# EAGLE board ADXL345_Breakout-Panel-v14 (EAGLE 6.5.0), part 1 of 3
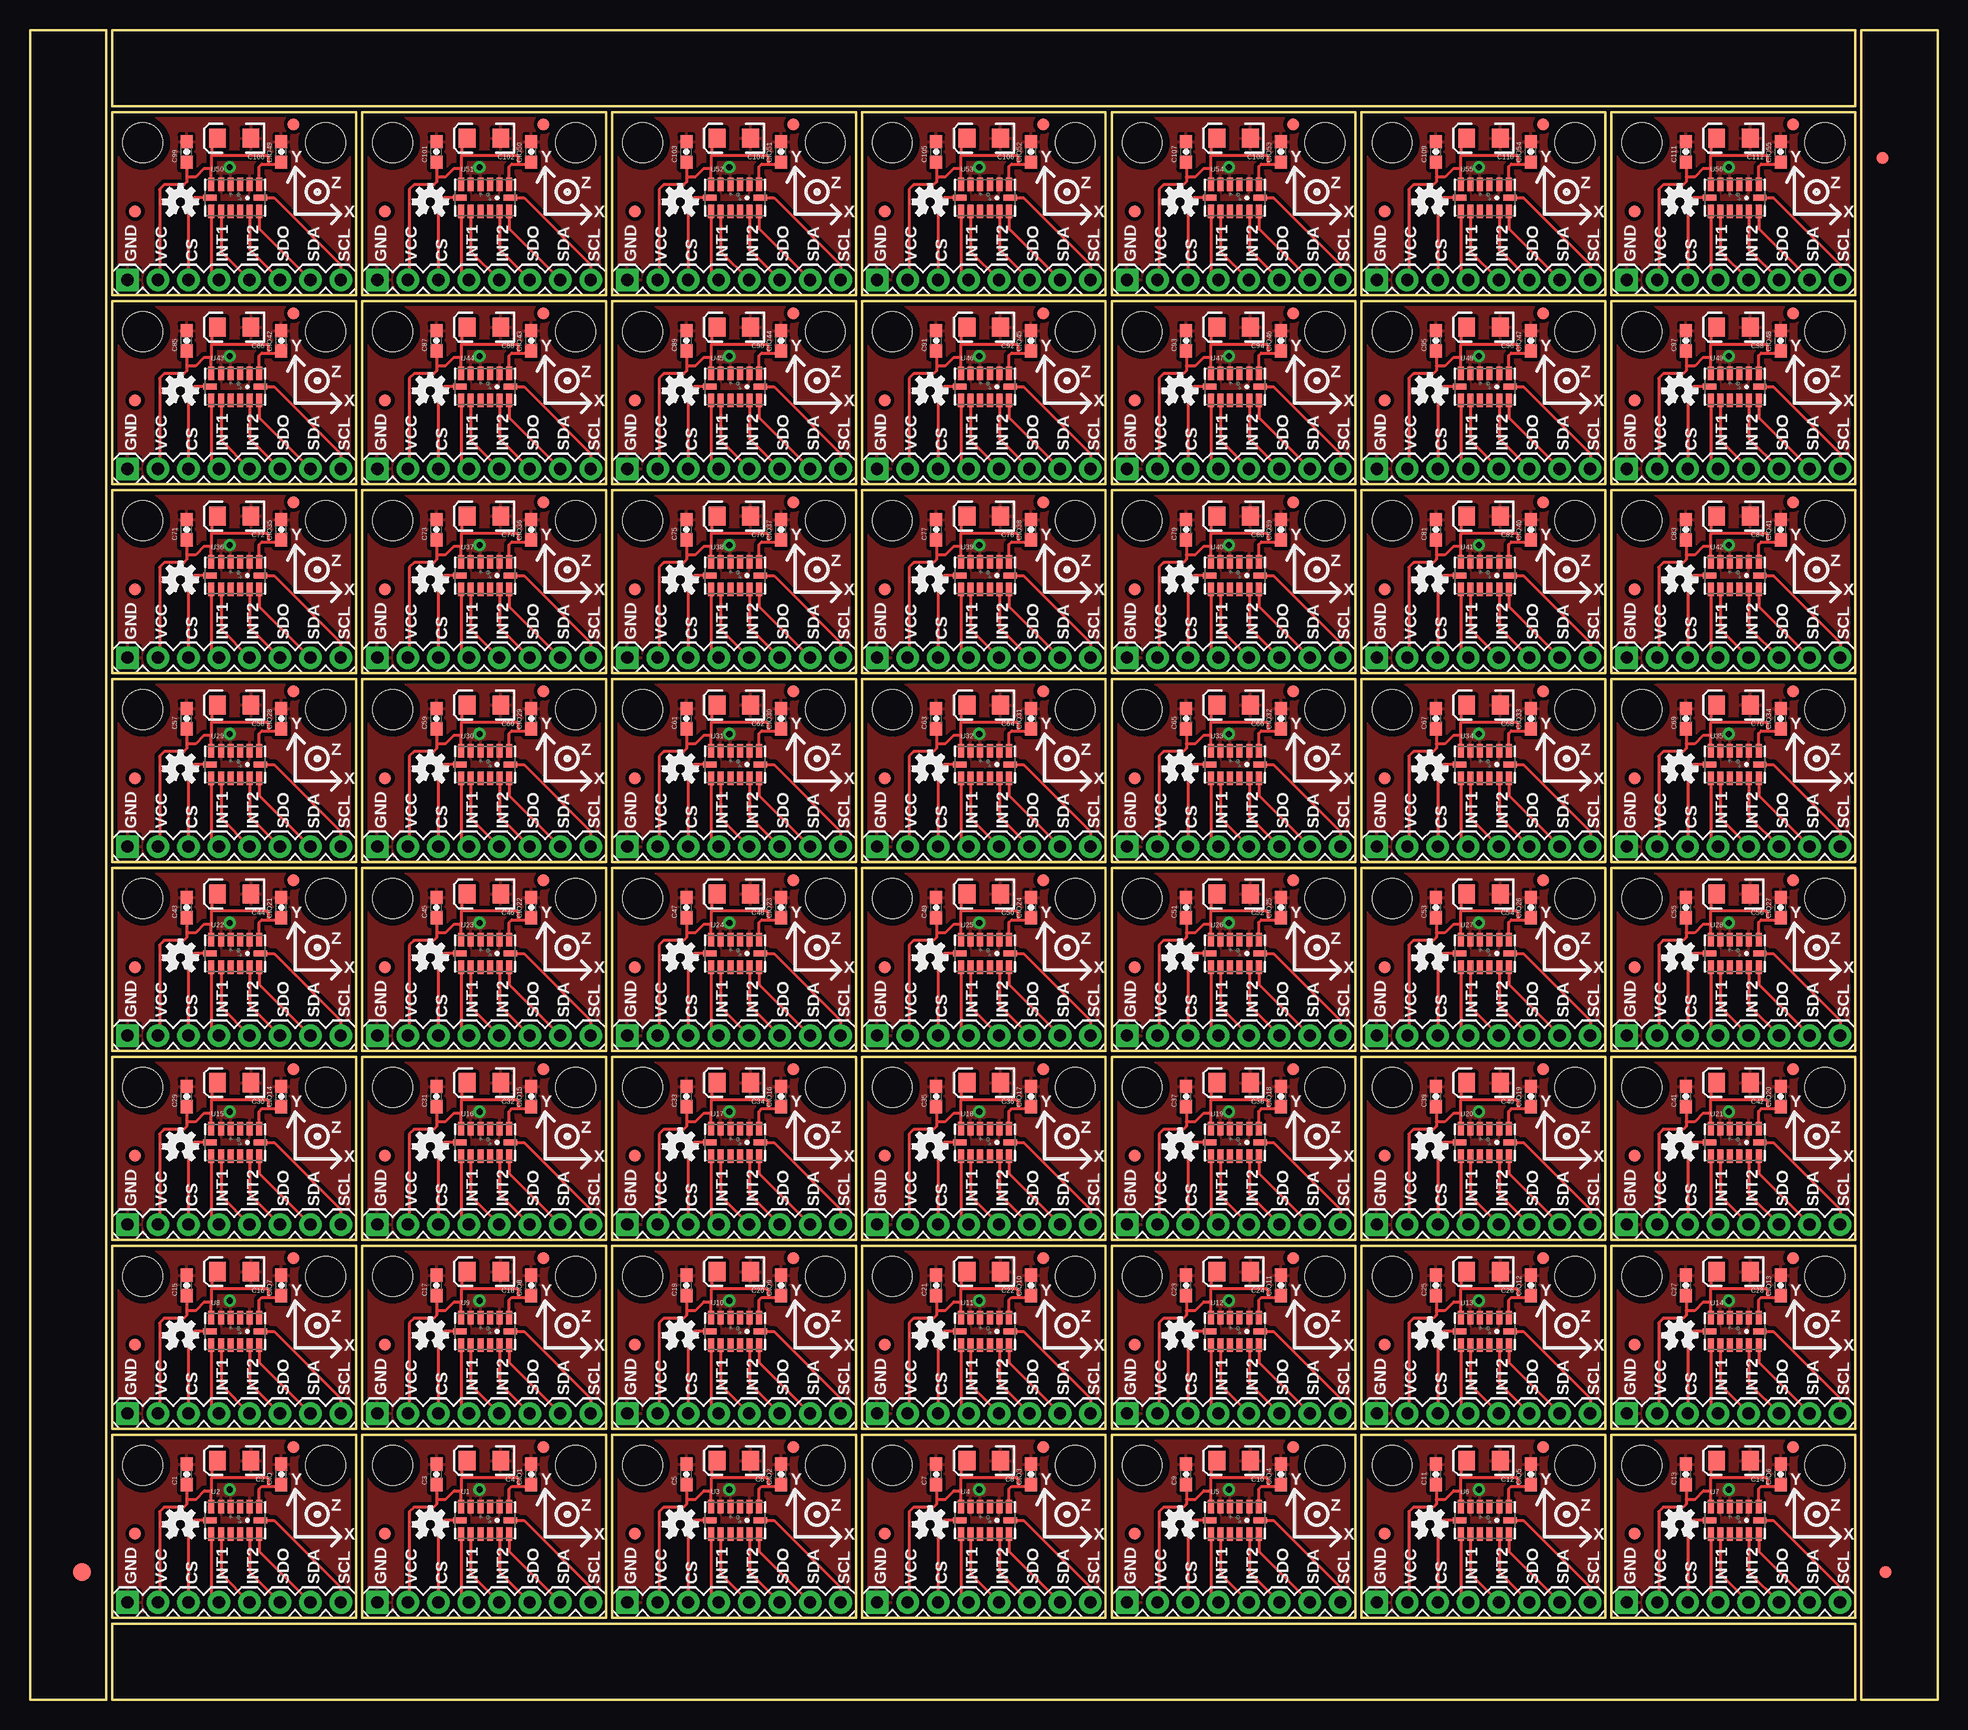
[diagram p0: board, top side]
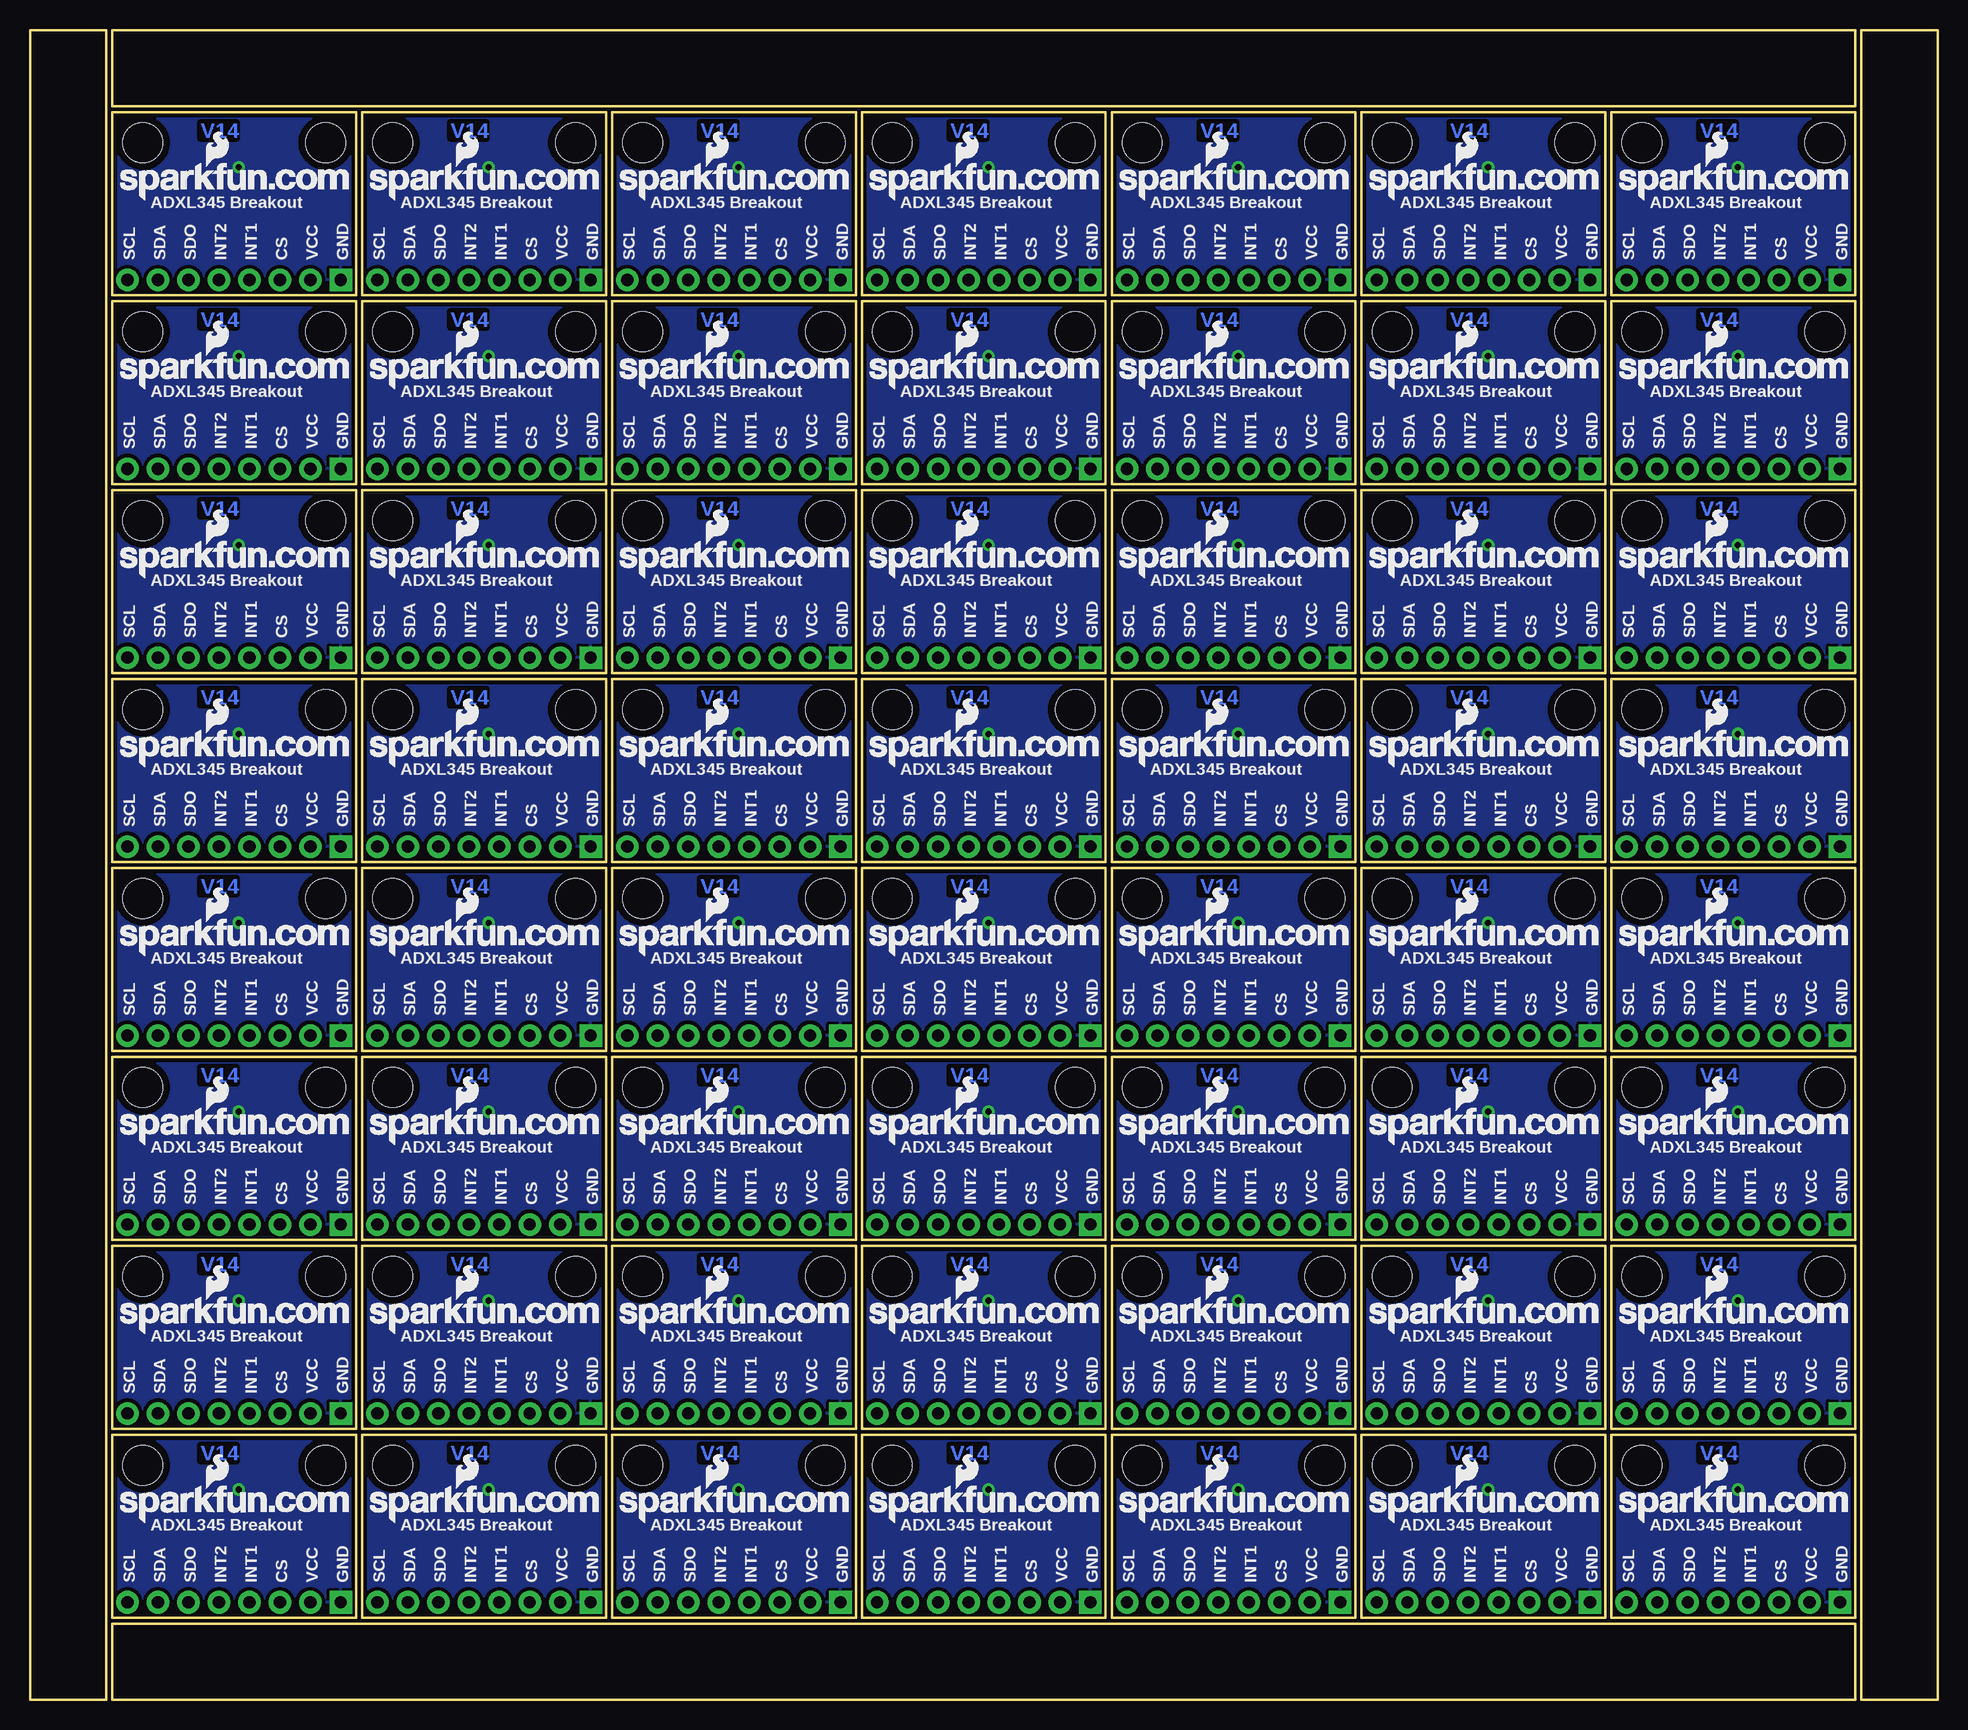
[diagram p1: board, bottom side, seen from below]

Size 159 x 139.19 mm. Coordinates in mm from the lower left corner, seen from the top.
Outline: 240 segments
Copper layers (1*16): Top 0.035mm / dielectric 1.5mm / Bottom 0.035mm
Design rules "SparkFun *": minimum track width 8mil, minimum drill 20mil, track to track 8mil, track to pad 8mil, pad to pad 8mil, via to via 8mil, smd to smd 8mil, copper to edge 8mil, drill to drill 8mil, minimum pad ring 12mil, minimum via ring 10mil, stop-mask expansion 4mil, vias tented up to drill 20mil, thermal gap 10mil
tRestrict: area 16.2,15.7 to 16.5,16; area 17,15.7 to 17.2,15.9; area 37,15.7 to 37.3,16; area 37.8,15.7 to 38.1,15.9; area 57.9,15.7 to 58.1,16; area 58.6,15.7 to 58.9,15.9; area 78.7,15.7 to 78.9,16; area 79.5,15.7 to 79.7,15.9; area 99.5,15.7 to 99.8,16; area 100.3,15.7 to 100.6,15.9; area 120.3,15.7 to 120.6,16; area 121.1,15.7 to 121.4,15.9; 100 more areas

## Footprints (pad centres in the part's own frame; a part is rotated, then mirrored left to right if it is on the bottom)
0603-CAP = smd 1.1 x 1: 1 -0.85,0; 2 0.85,0
EIA3216 = smd 1.4 x 1.6: A 1.4,0; C -1.4,0
FIDUCIAL-1.5X3 = smd 1.5 x 1.5: 1 0,0
FIDUCIAL-1X2 = smd 1 x 1: 1 0,0
1X08 = drill 1.016 pad 1.88 square: 1 0,0 | drill 1.016 pad 1.88: 2 2.54,0; 3 5.08,0; 4 7.62,0; 5 10.16,0; 6 12.7,0; 7 15.24,0; 8 17.78,0
STAND-OFF = hole 3.302: 0,0
LGA14_1:1_PATRICK = smd 0.5 x 1.124: 1 2,1.138; 2 1.2,1.138; 3 0.4,1.138; 4 -0.4,1.138; 5 -1.2,1.138; 6 -2,1.138; 8 -2,-1.13; 9 -1.2,-1.138; 10 -0.4,-1.138; 11 0.4,-1.138; 12 1.2,-1.138; 13 2,-1.138 | smd 1.124 x 0.5: 7 -2.1,0; 14 2.1,0

## Placement (x,y rotation side)
C1  0.1uF  [0603-CAP]  13.06,18.8 90 top
C2  10uF  [EIA3216]  17.02,19.94 180 top
C3  0.1uF  [0603-CAP]  33.88,18.8 90 top
C4  10uF  [EIA3216]  37.85,19.94 180 top
C5  0.1uF  [0603-CAP]  54.71,18.8 90 top
C6  10uF  [EIA3216]  58.67,19.94 180 top
C7  0.1uF  [0603-CAP]  75.54,18.8 90 top
C8  10uF  [EIA3216]  79.5,19.94 180 top
C9  0.1uF  [0603-CAP]  96.37,18.8 90 top
C10  10uF  [EIA3216]  100.33,19.94 180 top
C11  0.1uF  [0603-CAP]  117.2,18.8 90 top
C12  10uF  [EIA3216]  121.16,19.94 180 top
C13  0.1uF  [0603-CAP]  138.02,18.8 90 top
C14  10uF  [EIA3216]  141.99,19.94 180 top
C15  0.1uF  [0603-CAP]  13.06,34.54 90 top
C16  10uF  [EIA3216]  17.02,35.69 180 top
C17  0.1uF  [0603-CAP]  33.88,34.54 90 top
C18  10uF  [EIA3216]  37.85,35.69 180 top
C19  0.1uF  [0603-CAP]  54.71,34.54 90 top
C20  10uF  [EIA3216]  58.67,35.69 180 top
C21  0.1uF  [0603-CAP]  75.54,34.54 90 top
C22  10uF  [EIA3216]  79.5,35.69 180 top
C23  0.1uF  [0603-CAP]  96.37,34.54 90 top
C24  10uF  [EIA3216]  100.33,35.69 180 top
C25  0.1uF  [0603-CAP]  117.2,34.54 90 top
C26  10uF  [EIA3216]  121.16,35.69 180 top
C27  0.1uF  [0603-CAP]  138.02,34.54 90 top
C28  10uF  [EIA3216]  141.99,35.69 180 top
C29  0.1uF  [0603-CAP]  13.06,50.29 90 top
C30  10uF  [EIA3216]  17.02,51.44 180 top
C31  0.1uF  [0603-CAP]  33.88,50.29 90 top
C32  10uF  [EIA3216]  37.85,51.44 180 top
C33  0.1uF  [0603-CAP]  54.71,50.29 90 top
C34  10uF  [EIA3216]  58.67,51.44 180 top
C35  0.1uF  [0603-CAP]  75.54,50.29 90 top
C36  10uF  [EIA3216]  79.5,51.44 180 top
C37  0.1uF  [0603-CAP]  96.37,50.29 90 top
C38  10uF  [EIA3216]  100.33,51.44 180 top
C39  0.1uF  [0603-CAP]  117.2,50.29 90 top
C40  10uF  [EIA3216]  121.16,51.44 180 top
C41  0.1uF  [0603-CAP]  138.02,50.29 90 top
C42  10uF  [EIA3216]  141.99,51.44 180 top
C43  0.1uF  [0603-CAP]  13.06,66.04 90 top
C44  10uF  [EIA3216]  17.02,67.18 180 top
C45  0.1uF  [0603-CAP]  33.88,66.04 90 top
C46  10uF  [EIA3216]  37.85,67.18 180 top
C47  0.1uF  [0603-CAP]  54.71,66.04 90 top
C48  10uF  [EIA3216]  58.67,67.18 180 top
C49  0.1uF  [0603-CAP]  75.54,66.04 90 top
C50  10uF  [EIA3216]  79.5,67.18 180 top
C51  0.1uF  [0603-CAP]  96.37,66.04 90 top
C52  10uF  [EIA3216]  100.33,67.18 180 top
C53  0.1uF  [0603-CAP]  117.2,66.04 90 top
C54  10uF  [EIA3216]  121.16,67.18 180 top
C55  0.1uF  [0603-CAP]  138.02,66.04 90 top
C56  10uF  [EIA3216]  141.99,67.18 180 top
C57  0.1uF  [0603-CAP]  13.06,81.79 90 top
C58  10uF  [EIA3216]  17.02,82.93 180 top
C59  0.1uF  [0603-CAP]  33.88,81.79 90 top
C60  10uF  [EIA3216]  37.85,82.93 180 top
C61  0.1uF  [0603-CAP]  54.71,81.79 90 top
C62  10uF  [EIA3216]  58.67,82.93 180 top
C63  0.1uF  [0603-CAP]  75.54,81.79 90 top
C64  10uF  [EIA3216]  79.5,82.93 180 top
C65  0.1uF  [0603-CAP]  96.37,81.79 90 top
C66  10uF  [EIA3216]  100.33,82.93 180 top
C67  0.1uF  [0603-CAP]  117.2,81.79 90 top
C68  10uF  [EIA3216]  121.16,82.93 180 top
C69  0.1uF  [0603-CAP]  138.02,81.79 90 top
C70  10uF  [EIA3216]  141.99,82.93 180 top
C71  0.1uF  [0603-CAP]  13.06,97.54 90 top
C72  10uF  [EIA3216]  17.02,98.68 180 top
C73  0.1uF  [0603-CAP]  33.88,97.54 90 top
C74  10uF  [EIA3216]  37.85,98.68 180 top
C75  0.1uF  [0603-CAP]  54.71,97.54 90 top
C76  10uF  [EIA3216]  58.67,98.68 180 top
C77  0.1uF  [0603-CAP]  75.54,97.54 90 top
C78  10uF  [EIA3216]  79.5,98.68 180 top
C79  0.1uF  [0603-CAP]  96.37,97.54 90 top
C80  10uF  [EIA3216]  100.33,98.68 180 top
C81  0.1uF  [0603-CAP]  117.2,97.54 90 top
C82  10uF  [EIA3216]  121.16,98.68 180 top
C83  0.1uF  [0603-CAP]  138.02,97.54 90 top
C84  10uF  [EIA3216]  141.99,98.68 180 top
C85  0.1uF  [0603-CAP]  13.06,113.28 90 top
C86  10uF  [EIA3216]  17.02,114.43 180 top
C87  0.1uF  [0603-CAP]  33.88,113.28 90 top
C88  10uF  [EIA3216]  37.85,114.43 180 top
C89  0.1uF  [0603-CAP]  54.71,113.28 90 top
C90  10uF  [EIA3216]  58.67,114.43 180 top
C91  0.1uF  [0603-CAP]  75.54,113.28 90 top
C92  10uF  [EIA3216]  79.5,114.43 180 top
C93  0.1uF  [0603-CAP]  96.37,113.28 90 top
C94  10uF  [EIA3216]  100.33,114.43 180 top
C95  0.1uF  [0603-CAP]  117.2,113.28 90 top
C96  10uF  [EIA3216]  121.16,114.43 180 top
C97  0.1uF  [0603-CAP]  138.02,113.28 90 top
C98  10uF  [EIA3216]  141.99,114.43 180 top
C99  0.1uF  [0603-CAP]  13.06,129.03 90 top
C100  10uF  [EIA3216]  17.02,130.18 180 top
C101  0.1uF  [0603-CAP]  33.88,129.03 90 top
C102  10uF  [EIA3216]  37.85,130.18 180 top
C103  0.1uF  [0603-CAP]  54.71,129.03 90 top
C104  10uF  [EIA3216]  58.67,130.18 180 top
C105  0.1uF  [0603-CAP]  75.54,129.03 90 top
C106  10uF  [EIA3216]  79.5,130.18 180 top
C107  0.1uF  [0603-CAP]  96.37,129.03 90 top
C108  10uF  [EIA3216]  100.33,130.18 180 top
C109  0.1uF  [0603-CAP]  117.2,129.03 90 top
C110  10uF  [EIA3216]  121.16,130.18 180 top
C111  0.1uF  [0603-CAP]  138.02,129.03 90 top
C112  10uF  [EIA3216]  141.99,130.18 180 top
CIO  0.1uF  [0603-CAP]  20.95,18.8 90 top
CIO1  0.1uF  [0603-CAP]  41.78,18.8 90 top
CIO2  0.1uF  [0603-CAP]  62.61,18.8 90 top
CIO3  0.1uF  [0603-CAP]  83.44,18.8 90 top
CIO4  0.1uF  [0603-CAP]  104.27,18.8 90 top
CIO5  0.1uF  [0603-CAP]  125.09,18.8 90 top
CIO6  0.1uF  [0603-CAP]  145.92,18.8 90 top
CIO7  0.1uF  [0603-CAP]  20.95,34.54 90 top
CIO8  0.1uF  [0603-CAP]  41.78,34.54 90 top
CIO9  0.1uF  [0603-CAP]  62.61,34.54 90 top
CIO10  0.1uF  [0603-CAP]  83.44,34.54 90 top
CIO11  0.1uF  [0603-CAP]  104.27,34.54 90 top
CIO12  0.1uF  [0603-CAP]  125.09,34.54 90 top
CIO13  0.1uF  [0603-CAP]  145.92,34.54 90 top
CIO14  0.1uF  [0603-CAP]  20.95,50.29 90 top
CIO15  0.1uF  [0603-CAP]  41.78,50.29 90 top
CIO16  0.1uF  [0603-CAP]  62.61,50.29 90 top
CIO17  0.1uF  [0603-CAP]  83.44,50.29 90 top
CIO18  0.1uF  [0603-CAP]  104.27,50.29 90 top
CIO19  0.1uF  [0603-CAP]  125.09,50.29 90 top
CIO20  0.1uF  [0603-CAP]  145.92,50.29 90 top
CIO21  0.1uF  [0603-CAP]  20.95,66.04 90 top
CIO22  0.1uF  [0603-CAP]  41.78,66.04 90 top
CIO23  0.1uF  [0603-CAP]  62.61,66.04 90 top
CIO24  0.1uF  [0603-CAP]  83.44,66.04 90 top
CIO25  0.1uF  [0603-CAP]  104.27,66.04 90 top
CIO26  0.1uF  [0603-CAP]  125.09,66.04 90 top
CIO27  0.1uF  [0603-CAP]  145.92,66.04 90 top
CIO28  0.1uF  [0603-CAP]  20.95,81.79 90 top
CIO29  0.1uF  [0603-CAP]  41.78,81.79 90 top
CIO30  0.1uF  [0603-CAP]  62.61,81.79 90 top
CIO31  0.1uF  [0603-CAP]  83.44,81.79 90 top
CIO32  0.1uF  [0603-CAP]  104.27,81.79 90 top
CIO33  0.1uF  [0603-CAP]  125.09,81.79 90 top
CIO34  0.1uF  [0603-CAP]  145.92,81.79 90 top
CIO35  0.1uF  [0603-CAP]  20.95,97.54 90 top
CIO36  0.1uF  [0603-CAP]  41.78,97.54 90 top
CIO37  0.1uF  [0603-CAP]  62.61,97.54 90 top
CIO38  0.1uF  [0603-CAP]  83.44,97.54 90 top
CIO39  0.1uF  [0603-CAP]  104.27,97.54 90 top
CIO40  0.1uF  [0603-CAP]  125.09,97.54 90 top
CIO41  0.1uF  [0603-CAP]  145.92,97.54 90 top
CIO42  0.1uF  [0603-CAP]  20.95,113.28 90 top
CIO43  0.1uF  [0603-CAP]  41.78,113.28 90 top
CIO44  0.1uF  [0603-CAP]  62.61,113.28 90 top
CIO45  0.1uF  [0603-CAP]  83.44,113.28 90 top
CIO46  0.1uF  [0603-CAP]  104.27,113.28 90 top
CIO47  0.1uF  [0603-CAP]  125.09,113.28 90 top
CIO48  0.1uF  [0603-CAP]  145.92,113.28 90 top
CIO49  0.1uF  [0603-CAP]  20.95,129.03 90 top
CIO50  0.1uF  [0603-CAP]  41.78,129.03 90 top
CIO51  0.1uF  [0603-CAP]  62.61,129.03 90 top
CIO52  0.1uF  [0603-CAP]  83.44,129.03 90 top
CIO53  0.1uF  [0603-CAP]  104.27,129.03 90 top
CIO54  0.1uF  [0603-CAP]  125.09,129.03 90 top
CIO55  0.1uF  [0603-CAP]  145.92,129.03 90 top
E$1  [FIDUCIAL-1.5X3]  4.32,10.67 0 top
E$4  [FIDUCIAL-1X2]  154.69,10.67 0 top
E$6  [FIDUCIAL-1X2]  154.43,128.52 180 top
JP1  [1X08]  8.13,8.13 0 top
JP2  STAND-OFF  [STAND-OFF]  9.4,19.56 0 top
JP3  STAND-OFF  [STAND-OFF]  24.64,19.56 0 top
JP4  FIDUCIAL1X2  [FIDUCIAL-1X2]  8.76,13.84 0 top
JP5  FIDUCIAL1X2  [FIDUCIAL-1X2]  21.97,21.08 0 top
JP6  [1X08]  28.96,8.13 0 top
JP7  STAND-OFF  [STAND-OFF]  30.23,19.56 0 top
JP8  STAND-OFF  [STAND-OFF]  45.47,19.56 0 top
JP9  FIDUCIAL1X2  [FIDUCIAL-1X2]  29.59,13.84 0 top
JP10  FIDUCIAL1X2  [FIDUCIAL-1X2]  42.8,21.08 0 top
JP11  [1X08]  49.78,8.13 0 top
JP12  STAND-OFF  [STAND-OFF]  51.05,19.56 0 top
JP13  STAND-OFF  [STAND-OFF]  66.29,19.56 0 top
JP14  FIDUCIAL1X2  [FIDUCIAL-1X2]  50.42,13.84 0 top
JP15  FIDUCIAL1X2  [FIDUCIAL-1X2]  63.63,21.08 0 top
JP16  [1X08]  70.61,8.13 0 top
JP17  STAND-OFF  [STAND-OFF]  71.88,19.56 0 top
JP18  STAND-OFF  [STAND-OFF]  87.12,19.56 0 top
JP19  FIDUCIAL1X2  [FIDUCIAL-1X2]  71.25,13.84 0 top
JP20  FIDUCIAL1X2  [FIDUCIAL-1X2]  84.45,21.08 0 top
JP21  [1X08]  91.44,8.13 0 top
JP22  STAND-OFF  [STAND-OFF]  92.71,19.56 0 top
JP23  STAND-OFF  [STAND-OFF]  107.95,19.56 0 top
JP24  FIDUCIAL1X2  [FIDUCIAL-1X2]  92.08,13.84 0 top
JP25  FIDUCIAL1X2  [FIDUCIAL-1X2]  105.28,21.08 0 top
JP26  [1X08]  112.27,8.13 0 top
JP27  STAND-OFF  [STAND-OFF]  113.54,19.56 0 top
JP28  STAND-OFF  [STAND-OFF]  128.78,19.56 0 top
JP29  FIDUCIAL1X2  [FIDUCIAL-1X2]  112.9,13.84 0 top
JP30  FIDUCIAL1X2  [FIDUCIAL-1X2]  126.11,21.08 0 top
JP31  [1X08]  133.1,8.13 0 top
JP32  STAND-OFF  [STAND-OFF]  134.37,19.56 0 top
JP33  STAND-OFF  [STAND-OFF]  149.61,19.56 0 top
JP34  FIDUCIAL1X2  [FIDUCIAL-1X2]  133.73,13.84 0 top
JP35  FIDUCIAL1X2  [FIDUCIAL-1X2]  146.94,21.08 0 top
JP36  [1X08]  8.13,23.88 0 top
JP37  STAND-OFF  [STAND-OFF]  9.4,35.31 0 top
JP38  STAND-OFF  [STAND-OFF]  24.64,35.31 0 top
JP39  FIDUCIAL1X2  [FIDUCIAL-1X2]  8.76,29.59 0 top
JP40  FIDUCIAL1X2  [FIDUCIAL-1X2]  21.97,36.83 0 top
JP41  [1X08]  28.96,23.88 0 top
JP42  STAND-OFF  [STAND-OFF]  30.23,35.31 0 top
JP43  STAND-OFF  [STAND-OFF]  45.47,35.31 0 top
JP44  FIDUCIAL1X2  [FIDUCIAL-1X2]  29.59,29.59 0 top
JP45  FIDUCIAL1X2  [FIDUCIAL-1X2]  42.8,36.83 0 top
JP46  [1X08]  49.78,23.88 0 top
JP47  STAND-OFF  [STAND-OFF]  51.05,35.31 0 top
JP48  STAND-OFF  [STAND-OFF]  66.29,35.31 0 top
JP49  FIDUCIAL1X2  [FIDUCIAL-1X2]  50.42,29.59 0 top
JP50  FIDUCIAL1X2  [FIDUCIAL-1X2]  63.63,36.83 0 top
JP51  [1X08]  70.61,23.88 0 top
JP52  STAND-OFF  [STAND-OFF]  71.88,35.31 0 top
JP53  STAND-OFF  [STAND-OFF]  87.12,35.31 0 top
JP54  FIDUCIAL1X2  [FIDUCIAL-1X2]  71.25,29.59 0 top
JP55  FIDUCIAL1X2  [FIDUCIAL-1X2]  84.45,36.83 0 top
JP56  [1X08]  91.44,23.88 0 top
JP57  STAND-OFF  [STAND-OFF]  92.71,35.31 0 top
JP58  STAND-OFF  [STAND-OFF]  107.95,35.31 0 top
JP59  FIDUCIAL1X2  [FIDUCIAL-1X2]  92.08,29.59 0 top
JP60  FIDUCIAL1X2  [FIDUCIAL-1X2]  105.28,36.83 0 top
JP61  [1X08]  112.27,23.88 0 top
JP62  STAND-OFF  [STAND-OFF]  113.54,35.31 0 top
JP63  STAND-OFF  [STAND-OFF]  128.78,35.31 0 top
JP64  FIDUCIAL1X2  [FIDUCIAL-1X2]  112.9,29.59 0 top
JP65  FIDUCIAL1X2  [FIDUCIAL-1X2]  126.11,36.83 0 top
JP66  [1X08]  133.1,23.88 0 top
JP67  STAND-OFF  [STAND-OFF]  134.37,35.31 0 top
JP68  STAND-OFF  [STAND-OFF]  149.61,35.31 0 top
JP69  FIDUCIAL1X2  [FIDUCIAL-1X2]  133.73,29.59 0 top
JP70  FIDUCIAL1X2  [FIDUCIAL-1X2]  146.94,36.83 0 top
JP71  [1X08]  8.13,39.62 0 top
JP72  STAND-OFF  [STAND-OFF]  9.4,51.05 0 top
JP73  STAND-OFF  [STAND-OFF]  24.64,51.05 0 top
JP74  FIDUCIAL1X2  [FIDUCIAL-1X2]  8.76,45.34 0 top
JP75  FIDUCIAL1X2  [FIDUCIAL-1X2]  21.97,52.58 0 top
JP76  [1X08]  28.96,39.62 0 top
JP77  STAND-OFF  [STAND-OFF]  30.23,51.05 0 top
JP78  STAND-OFF  [STAND-OFF]  45.47,51.05 0 top
JP79  FIDUCIAL1X2  [FIDUCIAL-1X2]  29.59,45.34 0 top
JP80  FIDUCIAL1X2  [FIDUCIAL-1X2]  42.8,52.58 0 top
JP81  [1X08]  49.78,39.62 0 top
JP82  STAND-OFF  [STAND-OFF]  51.05,51.05 0 top
JP83  STAND-OFF  [STAND-OFF]  66.29,51.05 0 top
JP84  FIDUCIAL1X2  [FIDUCIAL-1X2]  50.42,45.34 0 top
JP85  FIDUCIAL1X2  [FIDUCIAL-1X2]  63.63,52.58 0 top
JP86  [1X08]  70.61,39.62 0 top
JP87  STAND-OFF  [STAND-OFF]  71.88,51.05 0 top
JP88  STAND-OFF  [STAND-OFF]  87.12,51.05 0 top
JP89  FIDUCIAL1X2  [FIDUCIAL-1X2]  71.25,45.34 0 top
JP90  FIDUCIAL1X2  [FIDUCIAL-1X2]  84.45,52.58 0 top
JP91  [1X08]  91.44,39.62 0 top
JP92  STAND-OFF  [STAND-OFF]  92.71,51.05 0 top
JP93  STAND-OFF  [STAND-OFF]  107.95,51.05 0 top
JP94  FIDUCIAL1X2  [FIDUCIAL-1X2]  92.08,45.34 0 top
JP95  FIDUCIAL1X2  [FIDUCIAL-1X2]  105.28,52.58 0 top
JP96  [1X08]  112.27,39.62 0 top
JP97  STAND-OFF  [STAND-OFF]  113.54,51.05 0 top
JP98  STAND-OFF  [STAND-OFF]  128.78,51.05 0 top
JP99  FIDUCIAL1X2  [FIDUCIAL-1X2]  112.9,45.34 0 top
JP100  FIDUCIAL1X2  [FIDUCIAL-1X2]  126.11,52.58 0 top
JP101  [1X08]  133.1,39.62 0 top
JP102  STAND-OFF  [STAND-OFF]  134.37,51.05 0 top
JP103  STAND-OFF  [STAND-OFF]  149.61,51.05 0 top
JP104  FIDUCIAL1X2  [FIDUCIAL-1X2]  133.73,45.34 0 top
JP105  FIDUCIAL1X2  [FIDUCIAL-1X2]  146.94,52.58 0 top
JP106  [1X08]  8.13,55.37 0 top
JP107  STAND-OFF  [STAND-OFF]  9.4,66.8 0 top
JP108  STAND-OFF  [STAND-OFF]  24.64,66.8 0 top
JP109  FIDUCIAL1X2  [FIDUCIAL-1X2]  8.76,61.09 0 top
JP110  FIDUCIAL1X2  [FIDUCIAL-1X2]  21.97,68.33 0 top
JP111  [1X08]  28.96,55.37 0 top
JP112  STAND-OFF  [STAND-OFF]  30.23,66.8 0 top
JP113  STAND-OFF  [STAND-OFF]  45.47,66.8 0 top
JP114  FIDUCIAL1X2  [FIDUCIAL-1X2]  29.59,61.09 0 top
JP115  FIDUCIAL1X2  [FIDUCIAL-1X2]  42.8,68.33 0 top
JP116  [1X08]  49.78,55.37 0 top
JP117  STAND-OFF  [STAND-OFF]  51.05,66.8 0 top
JP118  STAND-OFF  [STAND-OFF]  66.29,66.8 0 top
JP119  FIDUCIAL1X2  [FIDUCIAL-1X2]  50.42,61.09 0 top
JP120  FIDUCIAL1X2  [FIDUCIAL-1X2]  63.63,68.33 0 top
JP121  [1X08]  70.61,55.37 0 top
JP122  STAND-OFF  [STAND-OFF]  71.88,66.8 0 top
JP123  STAND-OFF  [STAND-OFF]  87.12,66.8 0 top
JP124  FIDUCIAL1X2  [FIDUCIAL-1X2]  71.25,61.09 0 top
JP125  FIDUCIAL1X2  [FIDUCIAL-1X2]  84.45,68.33 0 top
JP126  [1X08]  91.44,55.37 0 top
JP127  STAND-OFF  [STAND-OFF]  92.71,66.8 0 top
JP128  STAND-OFF  [STAND-OFF]  107.95,66.8 0 top
JP129  FIDUCIAL1X2  [FIDUCIAL-1X2]  92.08,61.09 0 top
JP130  FIDUCIAL1X2  [FIDUCIAL-1X2]  105.28,68.33 0 top
JP131  [1X08]  112.27,55.37 0 top
JP132  STAND-OFF  [STAND-OFF]  113.54,66.8 0 top
JP133  STAND-OFF  [STAND-OFF]  128.78,66.8 0 top
JP134  FIDUCIAL1X2  [FIDUCIAL-1X2]  112.9,61.09 0 top
JP135  FIDUCIAL1X2  [FIDUCIAL-1X2]  126.11,68.33 0 top
JP136  [1X08]  133.1,55.37 0 top
JP137  STAND-OFF  [STAND-OFF]  134.37,66.8 0 top
JP138  STAND-OFF  [STAND-OFF]  149.61,66.8 0 top
JP139  FIDUCIAL1X2  [FIDUCIAL-1X2]  133.73,61.09 0 top
JP140  FIDUCIAL1X2  [FIDUCIAL-1X2]  146.94,68.33 0 top
JP141  [1X08]  8.13,71.12 0 top
JP142  STAND-OFF  [STAND-OFF]  9.4,82.55 0 top
JP143  STAND-OFF  [STAND-OFF]  24.64,82.55 0 top
JP144  FIDUCIAL1X2  [FIDUCIAL-1X2]  8.76,76.83 0 top
JP145  FIDUCIAL1X2  [FIDUCIAL-1X2]  21.97,84.07 0 top
JP146  [1X08]  28.96,71.12 0 top
JP147  STAND-OFF  [STAND-OFF]  30.23,82.55 0 top
JP148  STAND-OFF  [STAND-OFF]  45.47,82.55 0 top
JP149  FIDUCIAL1X2  [FIDUCIAL-1X2]  29.59,76.83 0 top
JP150  FIDUCIAL1X2  [FIDUCIAL-1X2]  42.8,84.07 0 top
JP151  [1X08]  49.78,71.12 0 top
JP152  STAND-OFF  [STAND-OFF]  51.05,82.55 0 top
JP153  STAND-OFF  [STAND-OFF]  66.29,82.55 0 top
JP154  FIDUCIAL1X2  [FIDUCIAL-1X2]  50.42,76.83 0 top
JP155  FIDUCIAL1X2  [FIDUCIAL-1X2]  63.63,84.07 0 top
JP156  [1X08]  70.61,71.12 0 top
JP157  STAND-OFF  [STAND-OFF]  71.88,82.55 0 top
JP158  STAND-OFF  [STAND-OFF]  87.12,82.55 0 top
JP159  FIDUCIAL1X2  [FIDUCIAL-1X2]  71.25,76.83 0 top
JP160  FIDUCIAL1X2  [FIDUCIAL-1X2]  84.45,84.07 0 top
JP161  [1X08]  91.44,71.12 0 top
JP162  STAND-OFF  [STAND-OFF]  92.71,82.55 0 top
JP163  STAND-OFF  [STAND-OFF]  107.95,82.55 0 top
JP164  FIDUCIAL1X2  [FIDUCIAL-1X2]  92.08,76.83 0 top
JP165  FIDUCIAL1X2  [FIDUCIAL-1X2]  105.28,84.07 0 top
JP166  [1X08]  112.27,71.12 0 top
JP167  STAND-OFF  [STAND-OFF]  113.54,82.55 0 top
JP168  STAND-OFF  [STAND-OFF]  128.78,82.55 0 top
JP169  FIDUCIAL1X2  [FIDUCIAL-1X2]  112.9,76.83 0 top
JP170  FIDUCIAL1X2  [FIDUCIAL-1X2]  126.11,84.07 0 top
JP171  [1X08]  133.1,71.12 0 top
JP172  STAND-OFF  [STAND-OFF]  134.37,82.55 0 top
JP173  STAND-OFF  [STAND-OFF]  149.61,82.55 0 top
JP174  FIDUCIAL1X2  [FIDUCIAL-1X2]  133.73,76.83 0 top
JP175  FIDUCIAL1X2  [FIDUCIAL-1X2]  146.94,84.07 0 top
JP176  [1X08]  8.13,86.87 0 top
JP177  STAND-OFF  [STAND-OFF]  9.4,98.3 0 top
JP178  STAND-OFF  [STAND-OFF]  24.64,98.3 0 top
JP179  FIDUCIAL1X2  [FIDUCIAL-1X2]  8.76,92.58 0 top
JP180  FIDUCIAL1X2  [FIDUCIAL-1X2]  21.97,99.82 0 top
JP181  [1X08]  28.96,86.87 0 top
JP182  STAND-OFF  [STAND-OFF]  30.23,98.3 0 top
JP183  STAND-OFF  [STAND-OFF]  45.47,98.3 0 top
JP184  FIDUCIAL1X2  [FIDUCIAL-1X2]  29.59,92.58 0 top
JP185  FIDUCIAL1X2  [FIDUCIAL-1X2]  42.8,99.82 0 top
JP186  [1X08]  49.78,86.87 0 top
JP187  STAND-OFF  [STAND-OFF]  51.05,98.3 0 top
JP188  STAND-OFF  [STAND-OFF]  66.29,98.3 0 top
JP189  FIDUCIAL1X2  [FIDUCIAL-1X2]  50.42,92.58 0 top
JP190  FIDUCIAL1X2  [FIDUCIAL-1X2]  63.63,99.82 0 top
JP191  [1X08]  70.61,86.87 0 top
JP192  STAND-OFF  [STAND-OFF]  71.88,98.3 0 top
JP193  STAND-OFF  [STAND-OFF]  87.12,98.3 0 top
JP194  FIDUCIAL1X2  [FIDUCIAL-1X2]  71.25,92.58 0 top
JP195  FIDUCIAL1X2  [FIDUCIAL-1X2]  84.45,99.82 0 top
JP196  [1X08]  91.44,86.87 0 top
JP197  STAND-OFF  [STAND-OFF]  92.71,98.3 0 top
JP198  STAND-OFF  [STAND-OFF]  107.95,98.3 0 top
JP199  FIDUCIAL1X2  [FIDUCIAL-1X2]  92.08,92.58 0 top
JP200  FIDUCIAL1X2  [FIDUCIAL-1X2]  105.28,99.82 0 top
JP201  [1X08]  112.27,86.87 0 top
JP202  STAND-OFF  [STAND-OFF]  113.54,98.3 0 top
JP203  STAND-OFF  [STAND-OFF]  128.78,98.3 0 top
JP204  FIDUCIAL1X2  [FIDUCIAL-1X2]  112.9,92.58 0 top
JP205  FIDUCIAL1X2  [FIDUCIAL-1X2]  126.11,99.82 0 top
JP206  [1X08]  133.1,86.87 0 top
JP207  STAND-OFF  [STAND-OFF]  134.37,98.3 0 top
JP208  STAND-OFF  [STAND-OFF]  149.61,98.3 0 top
JP209  FIDUCIAL1X2  [FIDUCIAL-1X2]  133.73,92.58 0 top
JP210  FIDUCIAL1X2  [FIDUCIAL-1X2]  146.94,99.82 0 top
JP211  [1X08]  8.13,102.62 0 top
JP212  STAND-OFF  [STAND-OFF]  9.4,114.05 0 top
JP213  STAND-OFF  [STAND-OFF]  24.64,114.05 0 top
JP214  FIDUCIAL1X2  [FIDUCIAL-1X2]  8.76,108.33 0 top
JP215  FIDUCIAL1X2  [FIDUCIAL-1X2]  21.97,115.57 0 top
JP216  [1X08]  28.96,102.62 0 top
JP217  STAND-OFF  [STAND-OFF]  30.23,114.05 0 top
JP218  STAND-OFF  [STAND-OFF]  45.47,114.05 0 top
JP219  FIDUCIAL1X2  [FIDUCIAL-1X2]  29.59,108.33 0 top
JP220  FIDUCIAL1X2  [FIDUCIAL-1X2]  42.8,115.57 0 top
JP221  [1X08]  49.78,102.62 0 top
JP222  STAND-OFF  [STAND-OFF]  51.05,114.05 0 top
JP223  STAND-OFF  [STAND-OFF]  66.29,114.05 0 top
JP224  FIDUCIAL1X2  [FIDUCIAL-1X2]  50.42,108.33 0 top
JP225  FIDUCIAL1X2  [FIDUCIAL-1X2]  63.63,115.57 0 top
JP226  [1X08]  70.61,102.62 0 top
JP227  STAND-OFF  [STAND-OFF]  71.88,114.05 0 top
JP228  STAND-OFF  [STAND-OFF]  87.12,114.05 0 top
JP229  FIDUCIAL1X2  [FIDUCIAL-1X2]  71.25,108.33 0 top
JP230  FIDUCIAL1X2  [FIDUCIAL-1X2]  84.45,115.57 0 top
JP231  [1X08]  91.44,102.62 0 top
JP232  STAND-OFF  [STAND-OFF]  92.71,114.05 0 top
JP233  STAND-OFF  [STAND-OFF]  107.95,114.05 0 top
JP234  FIDUCIAL1X2  [FIDUCIAL-1X2]  92.08,108.33 0 top
JP235  FIDUCIAL1X2  [FIDUCIAL-1X2]  105.28,115.57 0 top
JP236  [1X08]  112.27,102.62 0 top
JP237  STAND-OFF  [STAND-OFF]  113.54,114.05 0 top
JP238  STAND-OFF  [STAND-OFF]  128.78,114.05 0 top
JP239  FIDUCIAL1X2  [FIDUCIAL-1X2]  112.9,108.33 0 top
JP240  FIDUCIAL1X2  [FIDUCIAL-1X2]  126.11,115.57 0 top
JP241  [1X08]  133.1,102.62 0 top
JP242  STAND-OFF  [STAND-OFF]  134.37,114.05 0 top
JP243  STAND-OFF  [STAND-OFF]  149.61,114.05 0 top
JP244  FIDUCIAL1X2  [FIDUCIAL-1X2]  133.73,108.33 0 top
JP245  FIDUCIAL1X2  [FIDUCIAL-1X2]  146.94,115.57 0 top
JP246  [1X08]  8.13,118.36 0 top
JP247  STAND-OFF  [STAND-OFF]  9.4,129.79 0 top
JP248  STAND-OFF  [STAND-OFF]  24.64,129.79 0 top
JP249  FIDUCIAL1X2  [FIDUCIAL-1X2]  8.76,124.08 0 top
JP250  FIDUCIAL1X2  [FIDUCIAL-1X2]  21.97,131.32 0 top
JP251  [1X08]  28.96,118.36 0 top
JP252  STAND-OFF  [STAND-OFF]  30.23,129.79 0 top
JP253  STAND-OFF  [STAND-OFF]  45.47,129.79 0 top
JP254  FIDUCIAL1X2  [FIDUCIAL-1X2]  29.59,124.08 0 top
JP255  FIDUCIAL1X2  [FIDUCIAL-1X2]  42.8,131.32 0 top
JP256  [1X08]  49.78,118.36 0 top
JP257  STAND-OFF  [STAND-OFF]  51.05,129.79 0 top
JP258  STAND-OFF  [STAND-OFF]  66.29,129.79 0 top
JP259  FIDUCIAL1X2  [FIDUCIAL-1X2]  50.42,124.08 0 top
JP260  FIDUCIAL1X2  [FIDUCIAL-1X2]  63.63,131.32 0 top
JP261  [1X08]  70.61,118.36 0 top
JP262  STAND-OFF  [STAND-OFF]  71.88,129.79 0 top
JP263  STAND-OFF  [STAND-OFF]  87.12,129.79 0 top
JP264  FIDUCIAL1X2  [FIDUCIAL-1X2]  71.25,124.08 0 top
JP265  FIDUCIAL1X2  [FIDUCIAL-1X2]  84.45,131.32 0 top
JP266  [1X08]  91.44,118.36 0 top
JP267  STAND-OFF  [STAND-OFF]  92.71,129.79 0 top
JP268  STAND-OFF  [STAND-OFF]  107.95,129.79 0 top
JP269  FIDUCIAL1X2  [FIDUCIAL-1X2]  92.08,124.08 0 top
JP270  FIDUCIAL1X2  [FIDUCIAL-1X2]  105.28,131.32 0 top
JP271  [1X08]  112.27,118.36 0 top
JP272  STAND-OFF  [STAND-OFF]  113.54,129.79 0 top
JP273  STAND-OFF  [STAND-OFF]  128.78,129.79 0 top
JP274  FIDUCIAL1X2  [FIDUCIAL-1X2]  112.9,124.08 0 top
JP275  FIDUCIAL1X2  [FIDUCIAL-1X2]  126.11,131.32 0 top
JP276  [1X08]  133.1,118.36 0 top
JP277  STAND-OFF  [STAND-OFF]  134.37,129.79 0 top
JP278  STAND-OFF  [STAND-OFF]  149.61,129.79 0 top
JP279  FIDUCIAL1X2  [FIDUCIAL-1X2]  133.73,124.08 0 top
JP280  FIDUCIAL1X2  [FIDUCIAL-1X2]  146.94,131.32 0 top
U1  ADXL345PATRICK  [LGA14_1:1_PATRICK]  37.95,14.96 0 top
U2  ADXL345PATRICK  [LGA14_1:1_PATRICK]  17.12,14.96 0 top
U3  ADXL345PATRICK  [LGA14_1:1_PATRICK]  58.78,14.96 0 top
U4  ADXL345PATRICK  [LGA14_1:1_PATRICK]  79.6,14.96 0 top
U5  ADXL345PATRICK  [LGA14_1:1_PATRICK]  100.43,14.96 0 top
U6  ADXL345PATRICK  [LGA14_1:1_PATRICK]  121.26,14.96 0 top
U7  ADXL345PATRICK  [LGA14_1:1_PATRICK]  142.09,14.96 0 top
U8  ADXL345PATRICK  [LGA14_1:1_PATRICK]  17.12,30.71 0 top
U9  ADXL345PATRICK  [LGA14_1:1_PATRICK]  37.95,30.71 0 top
U10  ADXL345PATRICK  [LGA14_1:1_PATRICK]  58.78,30.71 0 top
U11  ADXL345PATRICK  [LGA14_1:1_PATRICK]  79.6,30.71 0 top
U12  ADXL345PATRICK  [LGA14_1:1_PATRICK]  100.43,30.71 0 top
U13  ADXL345PATRICK  [LGA14_1:1_PATRICK]  121.26,30.71 0 top
U14  ADXL345PATRICK  [LGA14_1:1_PATRICK]  142.09,30.71 0 top
U15  ADXL345PATRICK  [LGA14_1:1_PATRICK]  17.12,46.46 0 top
U16  ADXL345PATRICK  [LGA14_1:1_PATRICK]  37.95,46.46 0 top
U17  ADXL345PATRICK  [LGA14_1:1_PATRICK]  58.78,46.46 0 top
U18  ADXL345PATRICK  [LGA14_1:1_PATRICK]  79.6,46.46 0 top
U19  ADXL345PATRICK  [LGA14_1:1_PATRICK]  100.43,46.46 0 top
U20  ADXL345PATRICK  [LGA14_1:1_PATRICK]  121.26,46.46 0 top
U21  ADXL345PATRICK  [LGA14_1:1_PATRICK]  142.09,46.46 0 top
U22  ADXL345PATRICK  [LGA14_1:1_PATRICK]  17.12,62.2 0 top
U23  ADXL345PATRICK  [LGA14_1:1_PATRICK]  37.95,62.2 0 top
U24  ADXL345PATRICK  [LGA14_1:1_PATRICK]  58.78,62.2 0 top
U25  ADXL345PATRICK  [LGA14_1:1_PATRICK]  79.6,62.2 0 top
U26  ADXL345PATRICK  [LGA14_1:1_PATRICK]  100.43,62.2 0 top
U27  ADXL345PATRICK  [LGA14_1:1_PATRICK]  121.26,62.2 0 top
U28  ADXL345PATRICK  [LGA14_1:1_PATRICK]  142.09,62.2 0 top
U29  ADXL345PATRICK  [LGA14_1:1_PATRICK]  17.12,77.95 0 top
U30  ADXL345PATRICK  [LGA14_1:1_PATRICK]  37.95,77.95 0 top
U31  ADXL345PATRICK  [LGA14_1:1_PATRICK]  58.78,77.95 0 top
U32  ADXL345PATRICK  [LGA14_1:1_PATRICK]  79.6,77.95 0 top
U33  ADXL345PATRICK  [LGA14_1:1_PATRICK]  100.43,77.95 0 top
U34  ADXL345PATRICK  [LGA14_1:1_PATRICK]  121.26,77.95 0 top
U35  ADXL345PATRICK  [LGA14_1:1_PATRICK]  142.09,77.95 0 top
U36  ADXL345PATRICK  [LGA14_1:1_PATRICK]  17.12,93.7 0 top
U37  ADXL345PATRICK  [LGA14_1:1_PATRICK]  37.95,93.7 0 top
U38  ADXL345PATRICK  [LGA14_1:1_PATRICK]  58.78,93.7 0 top
U39  ADXL345PATRICK  [LGA14_1:1_PATRICK]  79.6,93.7 0 top
U40  ADXL345PATRICK  [LGA14_1:1_PATRICK]  100.43,93.7 0 top
U41  ADXL345PATRICK  [LGA14_1:1_PATRICK]  121.26,93.7 0 top
U42  ADXL345PATRICK  [LGA14_1:1_PATRICK]  142.09,93.7 0 top
U43  ADXL345PATRICK  [LGA14_1:1_PATRICK]  17.12,109.45 0 top
U44  ADXL345PATRICK  [LGA14_1:1_PATRICK]  37.95,109.45 0 top
U45  ADXL345PATRICK  [LGA14_1:1_PATRICK]  58.78,109.45 0 top
U46  ADXL345PATRICK  [LGA14_1:1_PATRICK]  79.6,109.45 0 top
U47  ADXL345PATRICK  [LGA14_1:1_PATRICK]  100.43,109.45 0 top
U48  ADXL345PATRICK  [LGA14_1:1_PATRICK]  121.26,109.45 0 top
U49  ADXL345PATRICK  [LGA14_1:1_PATRICK]  142.09,109.45 0 top
U50  ADXL345PATRICK  [LGA14_1:1_PATRICK]  17.12,125.2 0 top
U51  ADXL345PATRICK  [LGA14_1:1_PATRICK]  37.95,125.2 0 top
U52  ADXL345PATRICK  [LGA14_1:1_PATRICK]  58.78,125.2 0 top
U53  ADXL345PATRICK  [LGA14_1:1_PATRICK]  79.6,125.2 0 top
U54  ADXL345PATRICK  [LGA14_1:1_PATRICK]  100.43,125.2 0 top
U55  ADXL345PATRICK  [LGA14_1:1_PATRICK]  121.26,125.2 0 top
U56  ADXL345PATRICK  [LGA14_1:1_PATRICK]  142.09,125.2 0 top
U$1  LOGO-SFENEW  [SFE-NEW-WEBLOGO]  47.37,14.73 0 bottom
U$2  LOGO-SFENEW  [SFE-NEW-WEBLOGO]  26.54,14.73 0 bottom
U$3  OSHW-LOGOS  [OSHW-LOGO-S]  12.55,14.63 0 top
U$4  OSHW-LOGOS  [OSHW-LOGO-S]  33.38,14.63 0 top
U$5  LOGO-SFENEW  [SFE-NEW-WEBLOGO]  68.2,14.73 0 bottom
U$6  OSHW-LOGOS  [OSHW-LOGO-S]  54.2,14.63 0 top
U$7  LOGO-SFENEW  [SFE-NEW-WEBLOGO]  89.03,14.73 0 bottom
U$8  OSHW-LOGOS  [OSHW-LOGO-S]  75.03,14.63 0 top
U$9  LOGO-SFENEW  [SFE-NEW-WEBLOGO]  109.86,14.73 0 bottom
U$10  OSHW-LOGOS  [OSHW-LOGO-S]  95.86,14.63 0 top
U$11  LOGO-SFENEW  [SFE-NEW-WEBLOGO]  130.68,14.73 0 bottom
U$12  OSHW-LOGOS  [OSHW-LOGO-S]  116.69,14.63 0 top
U$13  LOGO-SFENEW  [SFE-NEW-WEBLOGO]  151.51,14.73 0 bottom
U$14  OSHW-LOGOS  [OSHW-LOGO-S]  137.52,14.63 0 top
U$15  LOGO-SFENEW  [SFE-NEW-WEBLOGO]  26.54,30.48 0 bottom
U$16  OSHW-LOGOS  [OSHW-LOGO-S]  12.55,30.38 0 top
U$17  LOGO-SFENEW  [SFE-NEW-WEBLOGO]  47.37,30.48 0 bottom
U$18  OSHW-LOGOS  [OSHW-LOGO-S]  33.38,30.38 0 top
U$19  LOGO-SFENEW  [SFE-NEW-WEBLOGO]  68.2,30.48 0 bottom
U$20  OSHW-LOGOS  [OSHW-LOGO-S]  54.2,30.38 0 top
U$21  LOGO-SFENEW  [SFE-NEW-WEBLOGO]  89.03,30.48 0 bottom
U$22  OSHW-LOGOS  [OSHW-LOGO-S]  75.03,30.38 0 top
U$23  LOGO-SFENEW  [SFE-NEW-WEBLOGO]  109.86,30.48 0 bottom
U$24  OSHW-LOGOS  [OSHW-LOGO-S]  95.86,30.38 0 top
U$25  LOGO-SFENEW  [SFE-NEW-WEBLOGO]  130.68,30.48 0 bottom
U$26  OSHW-LOGOS  [OSHW-LOGO-S]  116.69,30.38 0 top
U$27  LOGO-SFENEW  [SFE-NEW-WEBLOGO]  151.51,30.48 0 bottom
U$28  OSHW-LOGOS  [OSHW-LOGO-S]  137.52,30.38 0 top
U$29  LOGO-SFENEW  [SFE-NEW-WEBLOGO]  26.54,46.23 0 bottom
U$30  OSHW-LOGOS  [OSHW-LOGO-S]  12.55,46.13 0 top
U$31  LOGO-SFENEW  [SFE-NEW-WEBLOGO]  47.37,46.23 0 bottom
U$32  OSHW-LOGOS  [OSHW-LOGO-S]  33.38,46.13 0 top
U$33  LOGO-SFENEW  [SFE-NEW-WEBLOGO]  68.2,46.23 0 bottom
U$34  OSHW-LOGOS  [OSHW-LOGO-S]  54.2,46.13 0 top
U$35  LOGO-SFENEW  [SFE-NEW-WEBLOGO]  89.03,46.23 0 bottom
U$36  OSHW-LOGOS  [OSHW-LOGO-S]  75.03,46.13 0 top
U$37  LOGO-SFENEW  [SFE-NEW-WEBLOGO]  109.86,46.23 0 bottom
U$38  OSHW-LOGOS  [OSHW-LOGO-S]  95.86,46.13 0 top
U$39  LOGO-SFENEW  [SFE-NEW-WEBLOGO]  130.68,46.23 0 bottom
U$40  OSHW-LOGOS  [OSHW-LOGO-S]  116.69,46.13 0 top
U$41  LOGO-SFENEW  [SFE-NEW-WEBLOGO]  151.51,46.23 0 bottom
U$42  OSHW-LOGOS  [OSHW-LOGO-S]  137.52,46.13 0 top
U$43  LOGO-SFENEW  [SFE-NEW-WEBLOGO]  26.54,61.98 0 bottom
U$44  OSHW-LOGOS  [OSHW-LOGO-S]  12.55,61.87 0 top
U$45  LOGO-SFENEW  [SFE-NEW-WEBLOGO]  47.37,61.98 0 bottom
U$46  OSHW-LOGOS  [OSHW-LOGO-S]  33.38,61.87 0 top
U$47  LOGO-SFENEW  [SFE-NEW-WEBLOGO]  68.2,61.98 0 bottom
U$48  OSHW-LOGOS  [OSHW-LOGO-S]  54.2,61.87 0 top
U$49  LOGO-SFENEW  [SFE-NEW-WEBLOGO]  89.03,61.98 0 bottom
U$50  OSHW-LOGOS  [OSHW-LOGO-S]  75.03,61.87 0 top
U$51  LOGO-SFENEW  [SFE-NEW-WEBLOGO]  109.86,61.98 0 bottom
U$52  OSHW-LOGOS  [OSHW-LOGO-S]  95.86,61.87 0 top
U$53  LOGO-SFENEW  [SFE-NEW-WEBLOGO]  130.68,61.98 0 bottom
U$54  OSHW-LOGOS  [OSHW-LOGO-S]  116.69,61.87 0 top
U$55  LOGO-SFENEW  [SFE-NEW-WEBLOGO]  151.51,61.98 0 bottom
U$56  OSHW-LOGOS  [OSHW-LOGO-S]  137.52,61.87 0 top
U$57  LOGO-SFENEW  [SFE-NEW-WEBLOGO]  26.54,77.72 0 bottom
U$58  OSHW-LOGOS  [OSHW-LOGO-S]  12.55,77.62 0 top
U$59  LOGO-SFENEW  [SFE-NEW-WEBLOGO]  47.37,77.72 0 bottom
U$60  OSHW-LOGOS  [OSHW-LOGO-S]  33.38,77.62 0 top
U$61  LOGO-SFENEW  [SFE-NEW-WEBLOGO]  68.2,77.72 0 bottom
U$62  OSHW-LOGOS  [OSHW-LOGO-S]  54.2,77.62 0 top
U$63  LOGO-SFENEW  [SFE-NEW-WEBLOGO]  89.03,77.72 0 bottom
U$64  OSHW-LOGOS  [OSHW-LOGO-S]  75.03,77.62 0 top
U$65  LOGO-SFENEW  [SFE-NEW-WEBLOGO]  109.86,77.72 0 bottom
U$66  OSHW-LOGOS  [OSHW-LOGO-S]  95.86,77.62 0 top
U$67  LOGO-SFENEW  [SFE-NEW-WEBLOGO]  130.68,77.72 0 bottom
U$68  OSHW-LOGOS  [OSHW-LOGO-S]  116.69,77.62 0 top
U$69  LOGO-SFENEW  [SFE-NEW-WEBLOGO]  151.51,77.72 0 bottom
U$70  OSHW-LOGOS  [OSHW-LOGO-S]  137.52,77.62 0 top
U$71  LOGO-SFENEW  [SFE-NEW-WEBLOGO]  26.54,93.47 0 bottom
U$72  OSHW-LOGOS  [OSHW-LOGO-S]  12.55,93.37 0 top
U$73  LOGO-SFENEW  [SFE-NEW-WEBLOGO]  47.37,93.47 0 bottom
U$74  OSHW-LOGOS  [OSHW-LOGO-S]  33.38,93.37 0 top
U$75  LOGO-SFENEW  [SFE-NEW-WEBLOGO]  68.2,93.47 0 bottom
U$76  OSHW-LOGOS  [OSHW-LOGO-S]  54.2,93.37 0 top
U$77  LOGO-SFENEW  [SFE-NEW-WEBLOGO]  89.03,93.47 0 bottom
U$78  OSHW-LOGOS  [OSHW-LOGO-S]  75.03,93.37 0 top
U$79  LOGO-SFENEW  [SFE-NEW-WEBLOGO]  109.86,93.47 0 bottom
U$80  OSHW-LOGOS  [OSHW-LOGO-S]  95.86,93.37 0 top
U$81  LOGO-SFENEW  [SFE-NEW-WEBLOGO]  130.68,93.47 0 bottom
U$82  OSHW-LOGOS  [OSHW-LOGO-S]  116.69,93.37 0 top
U$83  LOGO-SFENEW  [SFE-NEW-WEBLOGO]  151.51,93.47 0 bottom
U$84  OSHW-LOGOS  [OSHW-LOGO-S]  137.52,93.37 0 top
U$85  LOGO-SFENEW  [SFE-NEW-WEBLOGO]  26.54,109.22 0 bottom
U$86  OSHW-LOGOS  [OSHW-LOGO-S]  12.55,109.12 0 top
U$87  LOGO-SFENEW  [SFE-NEW-WEBLOGO]  47.37,109.22 0 bottom
U$88  OSHW-LOGOS  [OSHW-LOGO-S]  33.38,109.12 0 top
U$89  LOGO-SFENEW  [SFE-NEW-WEBLOGO]  68.2,109.22 0 bottom
U$90  OSHW-LOGOS  [OSHW-LOGO-S]  54.2,109.12 0 top
U$91  LOGO-SFENEW  [SFE-NEW-WEBLOGO]  89.03,109.22 0 bottom
U$92  OSHW-LOGOS  [OSHW-LOGO-S]  75.03,109.12 0 top
U$93  LOGO-SFENEW  [SFE-NEW-WEBLOGO]  109.86,109.22 0 bottom
U$94  OSHW-LOGOS  [OSHW-LOGO-S]  95.86,109.12 0 top
U$95  LOGO-SFENEW  [SFE-NEW-WEBLOGO]  130.68,109.22 0 bottom
U$96  OSHW-LOGOS  [OSHW-LOGO-S]  116.69,109.12 0 top
U$97  LOGO-SFENEW  [SFE-NEW-WEBLOGO]  151.51,109.22 0 bottom
U$98  OSHW-LOGOS  [OSHW-LOGO-S]  137.52,109.12 0 top
U$99  LOGO-SFENEW  [SFE-NEW-WEBLOGO]  26.54,124.97 0 bottom
U$100  OSHW-LOGOS  [OSHW-LOGO-S]  12.55,124.87 0 top
U$101  LOGO-SFENEW  [SFE-NEW-WEBLOGO]  47.37,124.97 0 bottom
U$102  OSHW-LOGOS  [OSHW-LOGO-S]  33.38,124.87 0 top
U$103  LOGO-SFENEW  [SFE-NEW-WEBLOGO]  68.2,124.97 0 bottom
U$104  OSHW-LOGOS  [OSHW-LOGO-S]  54.2,124.87 0 top
U$105  LOGO-SFENEW  [SFE-NEW-WEBLOGO]  89.03,124.97 0 bottom
U$106  OSHW-LOGOS  [OSHW-LOGO-S]  75.03,124.87 0 top
U$107  LOGO-SFENEW  [SFE-NEW-WEBLOGO]  109.86,124.97 0 bottom
U$108  OSHW-LOGOS  [OSHW-LOGO-S]  95.86,124.87 0 top
U$109  LOGO-SFENEW  [SFE-NEW-WEBLOGO]  130.68,124.97 0 bottom
U$110  OSHW-LOGOS  [OSHW-LOGO-S]  116.69,124.87 0 top
U$111  LOGO-SFENEW  [SFE-NEW-WEBLOGO]  151.51,124.97 0 bottom
U$112  OSHW-LOGOS  [OSHW-LOGO-S]  137.52,124.87 0 top

## Library data of the parts
C1-C112 CIO CIO1-CIO55 JP1-JP3 JP6-JP8 JP11-JP13 JP16-JP18 JP21-JP23 JP26-JP28 JP31-JP33 JP36-JP38 JP41-JP43 JP46-JP48 JP51-JP53 JP56-JP58 JP61-JP63 JP66-JP68 JP71-JP73 JP76-JP78 JP81-JP83 JP86-JP88 JP91-JP93 JP96-JP98 JP101-JP103 JP106-JP108 JP111-JP113 JP116-JP118 JP121-JP123 JP126-JP128 JP131-JP133 JP136-JP138 JP141-JP143 JP146-JP148 JP151-JP153 JP156-JP158 JP161-JP163 JP166-JP168 JP171-JP173 JP176-JP178 JP181-JP183 JP186-JP188 JP191-JP193 JP196-JP198 JP201-JP203 JP206-JP208 JP211-JP213 JP216-JP218 JP221-JP223 JP226-JP228 JP231-JP233 JP236-JP238 JP241-JP243 JP246-JP248 JP251-JP253 JP256-JP258 JP261-JP263 JP266-JP268 JP271-JP273 JP276-JP278 U$1 U$2 U$5 U$7 U$9 U$11 U$13 U$15 U$17 U$19 U$21 U$23 U$25 U$27 U$29 U$31 U$33 U$35 U$37 U$39 U$41 U$43 U$45 U$47 U$49 U$51 U$53 U$55 U$57 U$59 U$61 U$63 U$65 U$67 U$69 U$71 U$73 U$75 U$77 U$79 U$81 U$83 U$85 U$87 U$89 U$91 U$93 U$95 U$97 U$99 U$101 U$103 U$105 U$107 U$109 U$111 = SparkFun
E$1 E$4 E$6 JP4 JP5 JP9 JP10 JP14 JP15 JP19 JP20 JP24 JP25 JP29 JP30 JP34 JP35 JP39 JP40 JP44 JP45 JP49 JP50 JP54 JP55 JP59 JP60 JP64 JP65 JP69 JP70 JP74 JP75 JP79 JP80 JP84 JP85 JP89 JP90 JP94 JP95 JP99 JP100 JP104 JP105 JP109 JP110 JP114 JP115 JP119 JP120 JP124 JP125 JP129 JP130 JP134 JP135 JP139 JP140 JP144 JP145 JP149 JP150 JP154 JP155 JP159 JP160 JP164 JP165 JP169 JP170 JP174 JP175 JP179 JP180 JP184 JP185 JP189 JP190 JP194 JP195 JP199 JP200 JP204 JP205 JP209 JP210 JP214 JP215 JP219 JP220 JP224 JP225 JP229 JP230 JP234 JP235 JP239 JP240 JP244 JP245 JP249 JP250 JP254 JP255 JP259 JP260 JP264 JP265 JP269 JP270 JP274 JP275 JP279 JP280 U$3 U$4 U$6 U$8 U$10 U$12 U$14 U$16 U$18 U$20 U$22 U$24 U$26 U$28 U$30 U$32 U$34 U$36 U$38 U$40 U$42 U$44 U$46 U$48 U$50 U$52 U$54 U$56 U$58 U$60 U$62 U$64 U$66 U$68 U$70 U$72 U$74 U$76 U$78 U$80 U$82 U$84 U$86 U$88 U$90 U$92 U$94 U$96 U$98 U$100 U$102 U$104 U$106 U$108 U$110 U$112 = SparkFun-Aesthetics
U1-U56 = Testing

## Nets
CS: JP1.3 U2.7
CS1: JP6.3 U1.7
CS2: JP11.3 U3.7
CS3: JP16.3 U4.7
CS4: JP21.3 U5.7
CS5: JP26.3 U6.7
CS6: JP31.3 U7.7
CS7: JP36.3 U8.7
CS8: JP41.3 U9.7
CS9: JP46.3 U10.7
CS10: JP51.3 U11.7
CS11: JP56.3 U12.7
CS12: JP61.3 U13.7
CS13: JP66.3 U14.7
CS14: JP71.3 U15.7
CS15: JP76.3 U16.7
CS16: JP81.3 U17.7
CS17: JP86.3 U18.7
CS18: JP91.3 U19.7
CS19: JP96.3 U20.7
CS20: JP101.3 U21.7
CS21: JP106.3 U22.7
CS22: JP111.3 U23.7
CS23: JP116.3 U24.7
CS24: JP121.3 U25.7
CS25: JP126.3 U26.7
CS26: JP131.3 U27.7
CS27: JP136.3 U28.7
CS28: JP141.3 U29.7
CS29: JP146.3 U30.7
CS30: JP151.3 U31.7
CS31: JP156.3 U32.7
CS32: JP161.3 U33.7
CS33: JP166.3 U34.7
CS34: JP171.3 U35.7
CS35: JP176.3 U36.7
CS36: JP181.3 U37.7
CS37: JP186.3 U38.7
CS38: JP191.3 U39.7
CS39: JP196.3 U40.7
CS40: JP201.3 U41.7
CS41: JP206.3 U42.7
CS42: JP211.3 U43.7
CS43: JP216.3 U44.7
CS44: JP221.3 U45.7
CS45: JP226.3 U46.7
CS46: JP231.3 U47.7
CS47: JP236.3 U48.7
CS48: JP241.3 U49.7
CS49: JP246.3 U50.7
CS50: JP251.3 U51.7
CS51: JP256.3 U52.7
CS52: JP261.3 U53.7
CS53: JP266.3 U54.7
CS54: JP271.3 U55.7
CS55: JP276.3 U56.7
GND: C1.2 C2.C CIO.2 JP1.1 U2.2 U2.4 U2.5
GND1: C3.2 C4.C CIO1.2 JP6.1 U1.2 U1.4 U1.5
GND2: C5.2 C6.C CIO2.2 JP11.1 U3.2 U3.4 U3.5
GND3: C7.2 C8.C CIO3.2 JP16.1 U4.2 U4.4 U4.5
GND4: C9.2 C10.C CIO4.2 JP21.1 U5.2 U5.4 U5.5
GND5: C11.2 C12.C CIO5.2 JP26.1 U6.2 U6.4 U6.5
GND6: C13.2 C14.C CIO6.2 JP31.1 U7.2 U7.4 U7.5
GND7: C15.2 C16.C CIO7.2 JP36.1 U8.2 U8.4 U8.5
GND8: C17.2 C18.C CIO8.2 JP41.1 U9.2 U9.4 U9.5
GND9: C19.2 C20.C CIO9.2 JP46.1 U10.2 U10.4 U10.5
GND10: C21.2 C22.C CIO10.2 JP51.1 U11.2 U11.4 U11.5
GND11: C23.2 C24.C CIO11.2 JP56.1 U12.2 U12.4 U12.5
GND12: C25.2 C26.C CIO12.2 JP61.1 U13.2 U13.4 U13.5
GND13: C27.2 C28.C CIO13.2 JP66.1 U14.2 U14.4 U14.5
GND14: C29.2 C30.C CIO14.2 JP71.1 U15.2 U15.4 U15.5
GND15: C31.2 C32.C CIO15.2 JP76.1 U16.2 U16.4 U16.5
GND16: C33.2 C34.C CIO16.2 JP81.1 U17.2 U17.4 U17.5
GND17: C35.2 C36.C CIO17.2 JP86.1 U18.2 U18.4 U18.5
GND18: C37.2 C38.C CIO18.2 JP91.1 U19.2 U19.4 U19.5
GND19: C39.2 C40.C CIO19.2 JP96.1 U20.2 U20.4 U20.5
GND20: C41.2 C42.C CIO20.2 JP101.1 U21.2 U21.4 U21.5
GND21: C43.2 C44.C CIO21.2 JP106.1 U22.2 U22.4 U22.5
GND22: C45.2 C46.C CIO22.2 JP111.1 U23.2 U23.4 U23.5
GND23: C47.2 C48.C CIO23.2 JP116.1 U24.2 U24.4 U24.5
GND24: C49.2 C50.C CIO24.2 JP121.1 U25.2 U25.4 U25.5
GND25: C51.2 C52.C CIO25.2 JP126.1 U26.2 U26.4 U26.5
GND26: C53.2 C54.C CIO26.2 JP131.1 U27.2 U27.4 U27.5
GND27: C55.2 C56.C CIO27.2 JP136.1 U28.2 U28.4 U28.5
GND28: C57.2 C58.C CIO28.2 JP141.1 U29.2 U29.4 U29.5
GND29: C59.2 C60.C CIO29.2 JP146.1 U30.2 U30.4 U30.5
GND30: C61.2 C62.C CIO30.2 JP151.1 U31.2 U31.4 U31.5
GND31: C63.2 C64.C CIO31.2 JP156.1 U32.2 U32.4 U32.5
GND32: C65.2 C66.C CIO32.2 JP161.1 U33.2 U33.4 U33.5
GND33: C67.2 C68.C CIO33.2 JP166.1 U34.2 U34.4 U34.5
GND34: C69.2 C70.C CIO34.2 JP171.1 U35.2 U35.4 U35.5
GND35: C71.2 C72.C CIO35.2 JP176.1 U36.2 U36.4 U36.5
GND36: C73.2 C74.C CIO36.2 JP181.1 U37.2 U37.4 U37.5
GND37: C75.2 C76.C CIO37.2 JP186.1 U38.2 U38.4 U38.5
GND38: C77.2 C78.C CIO38.2 JP191.1 U39.2 U39.4 U39.5
GND39: C79.2 C80.C CIO39.2 JP196.1 U40.2 U40.4 U40.5
GND40: C81.2 C82.C CIO40.2 JP201.1 U41.2 U41.4 U41.5
GND41: C83.2 C84.C CIO41.2 JP206.1 U42.2 U42.4 U42.5
GND42: C85.2 C86.C CIO42.2 JP211.1 U43.2 U43.4 U43.5
GND43: C87.2 C88.C CIO43.2 JP216.1 U44.2 U44.4 U44.5
GND44: C89.2 C90.C CIO44.2 JP221.1 U45.2 U45.4 U45.5
GND45: C91.2 C92.C CIO45.2 JP226.1 U46.2 U46.4 U46.5
GND46: C93.2 C94.C CIO46.2 JP231.1 U47.2 U47.4 U47.5
GND47: C95.2 C96.C CIO47.2 JP236.1 U48.2 U48.4 U48.5
GND48: C97.2 C98.C CIO48.2 JP241.1 U49.2 U49.4 U49.5
GND49: C99.2 C100.C CIO49.2 JP246.1 U50.2 U50.4 U50.5
GND50: C101.2 C102.C CIO50.2 JP251.1 U51.2 U51.4 U51.5
GND51: C103.2 C104.C CIO51.2 JP256.1 U52.2 U52.4 U52.5
GND52: C105.2 C106.C CIO52.2 JP261.1 U53.2 U53.4 U53.5
GND53: C107.2 C108.C CIO53.2 JP266.1 U54.2 U54.4 U54.5
GND54: C109.2 C110.C CIO54.2 JP271.1 U55.2 U55.4 U55.5
GND55: C111.2 C112.C CIO55.2 JP276.1 U56.2 U56.4 U56.5
INT1: JP1.4 U2.8
INT2: JP1.5 U2.9
INT3: JP6.5 U1.9
INT4: JP6.4 U1.8
INT5: JP11.5 U3.9
INT6: JP11.4 U3.8
INT7: JP16.5 U4.9
INT8: JP16.4 U4.8
INT9: JP21.5 U5.9
INT10: JP21.4 U5.8
INT11: JP26.5 U6.9
INT12: JP26.4 U6.8
INT13: JP31.5 U7.9
INT14: JP31.4 U7.8
INT15: JP36.5 U8.9
INT16: JP36.4 U8.8
INT17: JP41.5 U9.9
INT18: JP41.4 U9.8
INT19: JP46.5 U10.9
INT20: JP46.4 U10.8
INT21: JP51.5 U11.9
INT22: JP51.4 U11.8
INT23: JP56.5 U12.9
INT24: JP56.4 U12.8
INT25: JP61.5 U13.9
INT26: JP61.4 U13.8
INT27: JP66.5 U14.9
INT28: JP66.4 U14.8
INT29: JP71.5 U15.9
INT30: JP71.4 U15.8
INT31: JP76.5 U16.9
INT32: JP76.4 U16.8
INT33: JP81.5 U17.9
INT34: JP81.4 U17.8
INT35: JP86.5 U18.9
INT36: JP86.4 U18.8
INT37: JP91.5 U19.9
INT38: JP91.4 U19.8
INT39: JP96.5 U20.9
INT40: JP96.4 U20.8
INT41: JP101.5 U21.9
INT42: JP101.4 U21.8
INT43: JP106.5 U22.9
INT44: JP106.4 U22.8
INT45: JP111.5 U23.9
INT46: JP111.4 U23.8
INT47: JP116.5 U24.9
INT48: JP116.4 U24.8
INT49: JP121.5 U25.9
INT50: JP121.4 U25.8
INT51: JP126.5 U26.9
INT52: JP126.4 U26.8
INT53: JP131.5 U27.9
INT54: JP131.4 U27.8
INT55: JP136.5 U28.9
INT56: JP136.4 U28.8
INT57: JP141.5 U29.9
INT58: JP141.4 U29.8
INT59: JP146.5 U30.9
INT60: JP146.4 U30.8
INT61: JP151.5 U31.9
INT62: JP151.4 U31.8
INT63: JP156.5 U32.9
INT64: JP156.4 U32.8
INT65: JP161.5 U33.9
INT66: JP161.4 U33.8
INT67: JP166.5 U34.9
INT68: JP166.4 U34.8
INT69: JP171.5 U35.9
INT70: JP171.4 U35.8
INT71: JP176.5 U36.9
INT72: JP176.4 U36.8
INT73: JP181.5 U37.9
INT74: JP181.4 U37.8
INT75: JP186.5 U38.9
INT76: JP186.4 U38.8
INT77: JP191.5 U39.9
INT78: JP191.4 U39.8
INT79: JP196.5 U40.9
INT80: JP196.4 U40.8
INT81: JP201.5 U41.9
INT82: JP201.4 U41.8
INT83: JP206.5 U42.9
INT84: JP206.4 U42.8
INT85: JP211.5 U43.9
INT86: JP211.4 U43.8
INT87: JP216.5 U44.9
INT88: JP216.4 U44.8
INT89: JP221.5 U45.9
INT90: JP221.4 U45.8
INT91: JP226.5 U46.9
INT92: JP226.4 U46.8
INT93: JP231.5 U47.9
INT94: JP231.4 U47.8
INT95: JP236.5 U48.9
INT96: JP236.4 U48.8
INT97: JP241.5 U49.9
INT98: JP241.4 U49.8
INT99: JP246.5 U50.9
INT100: JP246.4 U50.8
INT101: JP251.5 U51.9
INT102: JP251.4 U51.8
INT103: JP256.5 U52.9
INT104: JP256.4 U52.8
INT105: JP261.5 U53.9
INT106: JP261.4 U53.8
INT107: JP266.5 U54.9
INT108: JP266.4 U54.8
INT109: JP271.5 U55.9
INT110: JP271.4 U55.8
INT111: JP276.5 U56.9
INT112: JP276.4 U56.8
SCL: JP1.8 U2.14
SCL1: JP6.8 U1.14
SCL2: JP11.8 U3.14
SCL3: JP16.8 U4.14
SCL4: JP21.8 U5.14
SCL5: JP26.8 U6.14
SCL6: JP31.8 U7.14
SCL7: JP36.8 U8.14
SCL8: JP41.8 U9.14
SCL9: JP46.8 U10.14
SCL10: JP51.8 U11.14
SCL11: JP56.8 U12.14
SCL12: JP61.8 U13.14
SCL13: JP66.8 U14.14
SCL14: JP71.8 U15.14
SCL15: JP76.8 U16.14
SCL16: JP81.8 U17.14
SCL17: JP86.8 U18.14
SCL18: JP91.8 U19.14
SCL19: JP96.8 U20.14
SCL20: JP101.8 U21.14
SCL21: JP106.8 U22.14
SCL22: JP111.8 U23.14
SCL23: JP116.8 U24.14
SCL24: JP121.8 U25.14
SCL25: JP126.8 U26.14
SCL26: JP131.8 U27.14
SCL27: JP136.8 U28.14
SCL28: JP141.8 U29.14
SCL29: JP146.8 U30.14
SCL30: JP151.8 U31.14
SCL31: JP156.8 U32.14
SCL32: JP161.8 U33.14
SCL33: JP166.8 U34.14
SCL34: JP171.8 U35.14
SCL35: JP176.8 U36.14
SCL36: JP181.8 U37.14
SCL37: JP186.8 U38.14
SCL38: JP191.8 U39.14
SCL39: JP196.8 U40.14
SCL40: JP201.8 U41.14
SCL41: JP206.8 U42.14
SCL42: JP211.8 U43.14
SCL43: JP216.8 U44.14
SCL44: JP221.8 U45.14
SCL45: JP226.8 U46.14
SCL46: JP231.8 U47.14
SCL47: JP236.8 U48.14
SCL48: JP241.8 U49.14
SCL49: JP246.8 U50.14
SCL50: JP251.8 U51.14
SCL51: JP256.8 U52.14
SCL52: JP261.8 U53.14
SCL53: JP266.8 U54.14
SCL54: JP271.8 U55.14
SCL55: JP276.8 U56.14
SDA: JP1.7 U2.13
SDA1: JP6.7 U1.13
SDA2: JP11.7 U3.13
SDA3: JP16.7 U4.13
SDA4: JP21.7 U5.13
SDA5: JP26.7 U6.13
SDA6: JP31.7 U7.13
SDA7: JP36.7 U8.13
SDA8: JP41.7 U9.13
SDA9: JP46.7 U10.13
SDA10: JP51.7 U11.13
SDA11: JP56.7 U12.13
SDA12: JP61.7 U13.13
SDA13: JP66.7 U14.13
SDA14: JP71.7 U15.13
SDA15: JP76.7 U16.13
SDA16: JP81.7 U17.13
SDA17: JP86.7 U18.13
SDA18: JP91.7 U19.13
SDA19: JP96.7 U20.13
SDA20: JP101.7 U21.13
SDA21: JP106.7 U22.13
SDA22: JP111.7 U23.13
SDA23: JP116.7 U24.13
SDA24: JP121.7 U25.13
SDA25: JP126.7 U26.13
SDA26: JP131.7 U27.13
SDA27: JP136.7 U28.13
SDA28: JP141.7 U29.13
SDA29: JP146.7 U30.13
SDA30: JP151.7 U31.13
SDA31: JP156.7 U32.13
SDA32: JP161.7 U33.13
SDA33: JP166.7 U34.13
SDA34: JP171.7 U35.13
SDA35: JP176.7 U36.13
SDA36: JP181.7 U37.13
SDA37: JP186.7 U38.13
SDA38: JP191.7 U39.13
SDA39: JP196.7 U40.13
SDA40: JP201.7 U41.13
SDA41: JP206.7 U42.13
SDA42: JP211.7 U43.13
SDA43: JP216.7 U44.13
SDA44: JP221.7 U45.13
SDA45: JP226.7 U46.13
SDA46: JP231.7 U47.13
SDA47: JP236.7 U48.13
SDA48: JP241.7 U49.13
SDA49: JP246.7 U50.13
SDA50: JP251.7 U51.13
SDA51: JP256.7 U52.13
SDA52: JP261.7 U53.13
SDA53: JP266.7 U54.13
SDA54: JP271.7 U55.13
SDA55: JP276.7 U56.13
SDO: JP1.6 U2.12
SDO1: JP6.6 U1.12
SDO2: JP11.6 U3.12
SDO3: JP16.6 U4.12
SDO4: JP21.6 U5.12
SDO5: JP26.6 U6.12
SDO6: JP31.6 U7.12
SDO7: JP36.6 U8.12
SDO8: JP41.6 U9.12
SDO9: JP46.6 U10.12
SDO10: JP51.6 U11.12
SDO11: JP56.6 U12.12
SDO12: JP61.6 U13.12
SDO13: JP66.6 U14.12
SDO14: JP71.6 U15.12
SDO15: JP76.6 U16.12
SDO16: JP81.6 U17.12
SDO17: JP86.6 U18.12
SDO18: JP91.6 U19.12
SDO19: JP96.6 U20.12
SDO20: JP101.6 U21.12
SDO21: JP106.6 U22.12
SDO22: JP111.6 U23.12
SDO23: JP116.6 U24.12
SDO24: JP121.6 U25.12
SDO25: JP126.6 U26.12
SDO26: JP131.6 U27.12
SDO27: JP136.6 U28.12
SDO28: JP141.6 U29.12
SDO29: JP146.6 U30.12
SDO30: JP151.6 U31.12
SDO31: JP156.6 U32.12
SDO32: JP161.6 U33.12
SDO33: JP166.6 U34.12
SDO34: JP171.6 U35.12
SDO35: JP176.6 U36.12
SDO36: JP181.6 U37.12
SDO37: JP186.6 U38.12
SDO38: JP191.6 U39.12
SDO39: JP196.6 U40.12
SDO40: JP201.6 U41.12
SDO41: JP206.6 U42.12
SDO42: JP211.6 U43.12
SDO43: JP216.6 U44.12
SDO44: JP221.6 U45.12
SDO45: JP226.6 U46.12
SDO46: JP231.6 U47.12
SDO47: JP236.6 U48.12
SDO48: JP241.6 U49.12
SDO49: JP246.6 U50.12
SDO50: JP251.6 U51.12
SDO51: JP256.6 U52.12
SDO52: JP261.6 U53.12
SDO53: JP266.6 U54.12
SDO54: JP271.6 U55.12
SDO55: JP276.6 U56.12
VCC: C1.1 C2.A CIO.1 JP1.2 U2.1 U2.6
VCC1: C3.1 C4.A CIO1.1 JP6.2 U1.1 U1.6
VCC2: C5.1 C6.A CIO2.1 JP11.2 U3.1 U3.6
VCC3: C7.1 C8.A CIO3.1 JP16.2 U4.1 U4.6
VCC4: C9.1 C10.A CIO4.1 JP21.2 U5.1 U5.6
VCC5: C11.1 C12.A CIO5.1 JP26.2 U6.1 U6.6
VCC6: C13.1 C14.A CIO6.1 JP31.2 U7.1 U7.6
VCC7: C15.1 C16.A CIO7.1 JP36.2 U8.1 U8.6
VCC8: C17.1 C18.A CIO8.1 JP41.2 U9.1 U9.6
VCC9: C19.1 C20.A CIO9.1 JP46.2 U10.1 U10.6
VCC10: C21.1 C22.A CIO10.1 JP51.2 U11.1 U11.6
VCC11: C23.1 C24.A CIO11.1 JP56.2 U12.1 U12.6
VCC12: C25.1 C26.A CIO12.1 JP61.2 U13.1 U13.6
VCC13: C27.1 C28.A CIO13.1 JP66.2 U14.1 U14.6
VCC14: C29.1 C30.A CIO14.1 JP71.2 U15.1 U15.6
VCC15: C31.1 C32.A CIO15.1 JP76.2 U16.1 U16.6
VCC16: C33.1 C34.A CIO16.1 JP81.2 U17.1 U17.6
VCC17: C35.1 C36.A CIO17.1 JP86.2 U18.1 U18.6
VCC18: C37.1 C38.A CIO18.1 JP91.2 U19.1 U19.6
VCC19: C39.1 C40.A CIO19.1 JP96.2 U20.1 U20.6
VCC20: C41.1 C42.A CIO20.1 JP101.2 U21.1 U21.6
VCC21: C43.1 C44.A CIO21.1 JP106.2 U22.1 U22.6
VCC22: C45.1 C46.A CIO22.1 JP111.2 U23.1 U23.6
VCC23: C47.1 C48.A CIO23.1 JP116.2 U24.1 U24.6
VCC24: C49.1 C50.A CIO24.1 JP121.2 U25.1 U25.6
VCC25: C51.1 C52.A CIO25.1 JP126.2 U26.1 U26.6
VCC26: C53.1 C54.A CIO26.1 JP131.2 U27.1 U27.6
VCC27: C55.1 C56.A CIO27.1 JP136.2 U28.1 U28.6
VCC28: C57.1 C58.A CIO28.1 JP141.2 U29.1 U29.6
VCC29: C59.1 C60.A CIO29.1 JP146.2 U30.1 U30.6
VCC30: C61.1 C62.A CIO30.1 JP151.2 U31.1 U31.6
VCC31: C63.1 C64.A CIO31.1 JP156.2 U32.1 U32.6
VCC32: C65.1 C66.A CIO32.1 JP161.2 U33.1 U33.6
VCC33: C67.1 C68.A CIO33.1 JP166.2 U34.1 U34.6
VCC34: C69.1 C70.A CIO34.1 JP171.2 U35.1 U35.6
VCC35: C71.1 C72.A CIO35.1 JP176.2 U36.1 U36.6
VCC36: C73.1 C74.A CIO36.1 JP181.2 U37.1 U37.6
VCC37: C75.1 C76.A CIO37.1 JP186.2 U38.1 U38.6
VCC38: C77.1 C78.A CIO38.1 JP191.2 U39.1 U39.6
VCC39: C79.1 C80.A CIO39.1 JP196.2 U40.1 U40.6
VCC40: C81.1 C82.A CIO40.1 JP201.2 U41.1 U41.6
VCC41: C83.1 C84.A CIO41.1 JP206.2 U42.1 U42.6
VCC42: C85.1 C86.A CIO42.1 JP211.2 U43.1 U43.6
VCC43: C87.1 C88.A CIO43.1 JP216.2 U44.1 U44.6
VCC44: C89.1 C90.A CIO44.1 JP221.2 U45.1 U45.6
VCC45: C91.1 C92.A CIO45.1 JP226.2 U46.1 U46.6
VCC46: C93.1 C94.A CIO46.1 JP231.2 U47.1 U47.6
VCC47: C95.1 C96.A CIO47.1 JP236.2 U48.1 U48.6
VCC48: C97.1 C98.A CIO48.1 JP241.2 U49.1 U49.6
VCC49: C99.1 C100.A CIO49.1 JP246.2 U50.1 U50.6
VCC50: C101.1 C102.A CIO50.1 JP251.2 U51.1 U51.6
VCC51: C103.1 C104.A CIO51.1 JP256.2 U52.1 U52.6
VCC52: C105.1 C106.A CIO52.1 JP261.2 U53.1 U53.6
VCC53: C107.1 C108.A CIO53.1 JP266.2 U54.1 U54.6
VCC54: C109.1 C110.A CIO54.1 JP271.2 U55.1 U55.6
VCC55: C111.1 C112.A CIO55.1 JP276.2 U56.1 U56.6

## Tracks (layer width: path | path; a pad name or v marks a point on that pad's centre or on a via)
CS
  Top 0.254: U2.7 13.69,14.96 13.21,14.48 JP1.3
CS1
  Top 0.254: U1.7 34.52,14.96 34.04,14.48 JP6.3
CS2
  Top 0.254: U3.7 55.35,14.96 54.86,14.48 JP11.3
CS3
  Top 0.254: U4.7 76.17,14.96 75.69,14.48 JP16.3
CS4
  Top 0.254: U5.7 97,14.96 96.52,14.48 JP21.3
CS5
  Top 0.254: U6.7 117.83,14.96 117.35,14.48 JP26.3
CS6
  Top 0.254: U7.7 138.66,14.96 138.18,14.48 JP31.3
CS7
  Top 0.254: U8.7 13.69,30.71 13.21,30.23 JP36.3
CS8
  Top 0.254: U9.7 34.52,30.71 34.04,30.23 JP41.3
CS9
  Top 0.254: U10.7 55.35,30.71 54.86,30.23 JP46.3
CS10
  Top 0.254: U11.7 76.17,30.71 75.69,30.23 JP51.3
CS11
  Top 0.254: U12.7 97,30.71 96.52,30.23 JP56.3
CS12
  Top 0.254: U13.7 117.83,30.71 117.35,30.23 JP61.3
CS13
  Top 0.254: U14.7 138.66,30.71 138.18,30.23 JP66.3
CS14
  Top 0.254: U15.7 13.69,46.46 13.21,45.97 JP71.3
CS15
  Top 0.254: U16.7 34.52,46.46 34.04,45.97 JP76.3
CS16
  Top 0.254: U17.7 55.35,46.46 54.86,45.97 JP81.3
CS17
  Top 0.254: U18.7 76.17,46.46 75.69,45.97 JP86.3
CS18
  Top 0.254: U19.7 97,46.46 96.52,45.97 JP91.3
CS19
  Top 0.254: U20.7 117.83,46.46 117.35,45.97 JP96.3
CS20
  Top 0.254: U21.7 138.66,46.46 138.18,45.97 JP101.3
CS21
  Top 0.254: U22.7 13.69,62.2 13.21,61.72 JP106.3
CS22
  Top 0.254: U23.7 34.52,62.2 34.04,61.72 JP111.3
CS23
  Top 0.254: U24.7 55.35,62.2 54.86,61.72 JP116.3
CS24
  Top 0.254: U25.7 76.17,62.2 75.69,61.72 JP121.3
CS25
  Top 0.254: U26.7 97,62.2 96.52,61.72 JP126.3
CS26
  Top 0.254: U27.7 117.83,62.2 117.35,61.72 JP131.3
CS27
  Top 0.254: U28.7 138.66,62.2 138.18,61.72 JP136.3
CS28
  Top 0.254: U29.7 13.69,77.95 13.21,77.47 JP141.3
CS29
  Top 0.254: U30.7 34.52,77.95 34.04,77.47 JP146.3
CS30
  Top 0.254: U31.7 55.35,77.95 54.86,77.47 JP151.3
CS31
  Top 0.254: U32.7 76.17,77.95 75.69,77.47 JP156.3
CS32
  Top 0.254: U33.7 97,77.95 96.52,77.47 JP161.3
CS33
  Top 0.254: U34.7 117.83,77.95 117.35,77.47 JP166.3
CS34
  Top 0.254: U35.7 138.66,77.95 138.18,77.47 JP171.3
CS35
  Top 0.254: U36.7 13.69,93.7 13.21,93.22 JP176.3
CS36
  Top 0.254: U37.7 34.52,93.7 34.04,93.22 JP181.3
CS37
  Top 0.254: U38.7 55.35,93.7 54.86,93.22 JP186.3
CS38
  Top 0.254: U39.7 76.17,93.7 75.69,93.22 JP191.3
CS39
  Top 0.254: U40.7 97,93.7 96.52,93.22 JP196.3
CS40
  Top 0.254: U41.7 117.83,93.7 117.35,93.22 JP201.3
CS41
  Top 0.254: U42.7 138.66,93.7 138.18,93.22 JP206.3
CS42
  Top 0.254: U43.7 13.69,109.45 13.21,108.97 JP211.3
CS43
  Top 0.254: U44.7 34.52,109.45 34.04,108.97 JP216.3
CS44
  Top 0.254: U45.7 55.35,109.45 54.86,108.97 JP221.3
CS45
  Top 0.254: U46.7 76.17,109.45 75.69,108.97 JP226.3
CS46
  Top 0.254: U47.7 97,109.45 96.52,108.97 JP231.3
CS47
  Top 0.254: U48.7 117.83,109.45 117.35,108.97 JP236.3
CS48
  Top 0.254: U49.7 138.66,109.45 138.18,108.97 JP241.3
CS49
  Top 0.254: U50.7 13.69,125.2 13.21,124.71 JP246.3
CS50
  Top 0.254: U51.7 34.52,125.2 34.04,124.71 JP251.3
CS51
  Top 0.254: U52.7 55.35,125.2 54.86,124.71 JP256.3
CS52
  Top 0.254: U53.7 76.17,125.2 75.69,124.71 JP261.3
CS53
  Top 0.254: U54.7 97,125.2 96.52,124.71 JP266.3
CS54
  Top 0.254: U55.7 117.83,125.2 117.35,124.71 JP271.3
CS55
  Top 0.254: U56.7 138.66,125.2 138.18,124.71 JP276.3
GND  (via drill 0.51)
  other vias: 16.64,17.53